# Altium PCB Sinistro_ASP_RevA.PcbDoc (part 1 of 5)
Units mm, origin at the board's own origin, x right, y up, seen from the top; angles counter-clockwise.
Board outline 150 x 110 mm, 8 copper layers (Top Layer (.GTL), MidLayer1 (.G1), +28V and VCC (.GP1), A and D grounds (.GP2), Earth GND (.GP3), +5ANA (.GP4), -5ANA (.GP5), Bottom Layer (.GBL)); 383 components, 275 nets, 1751 pads, 521 vias.
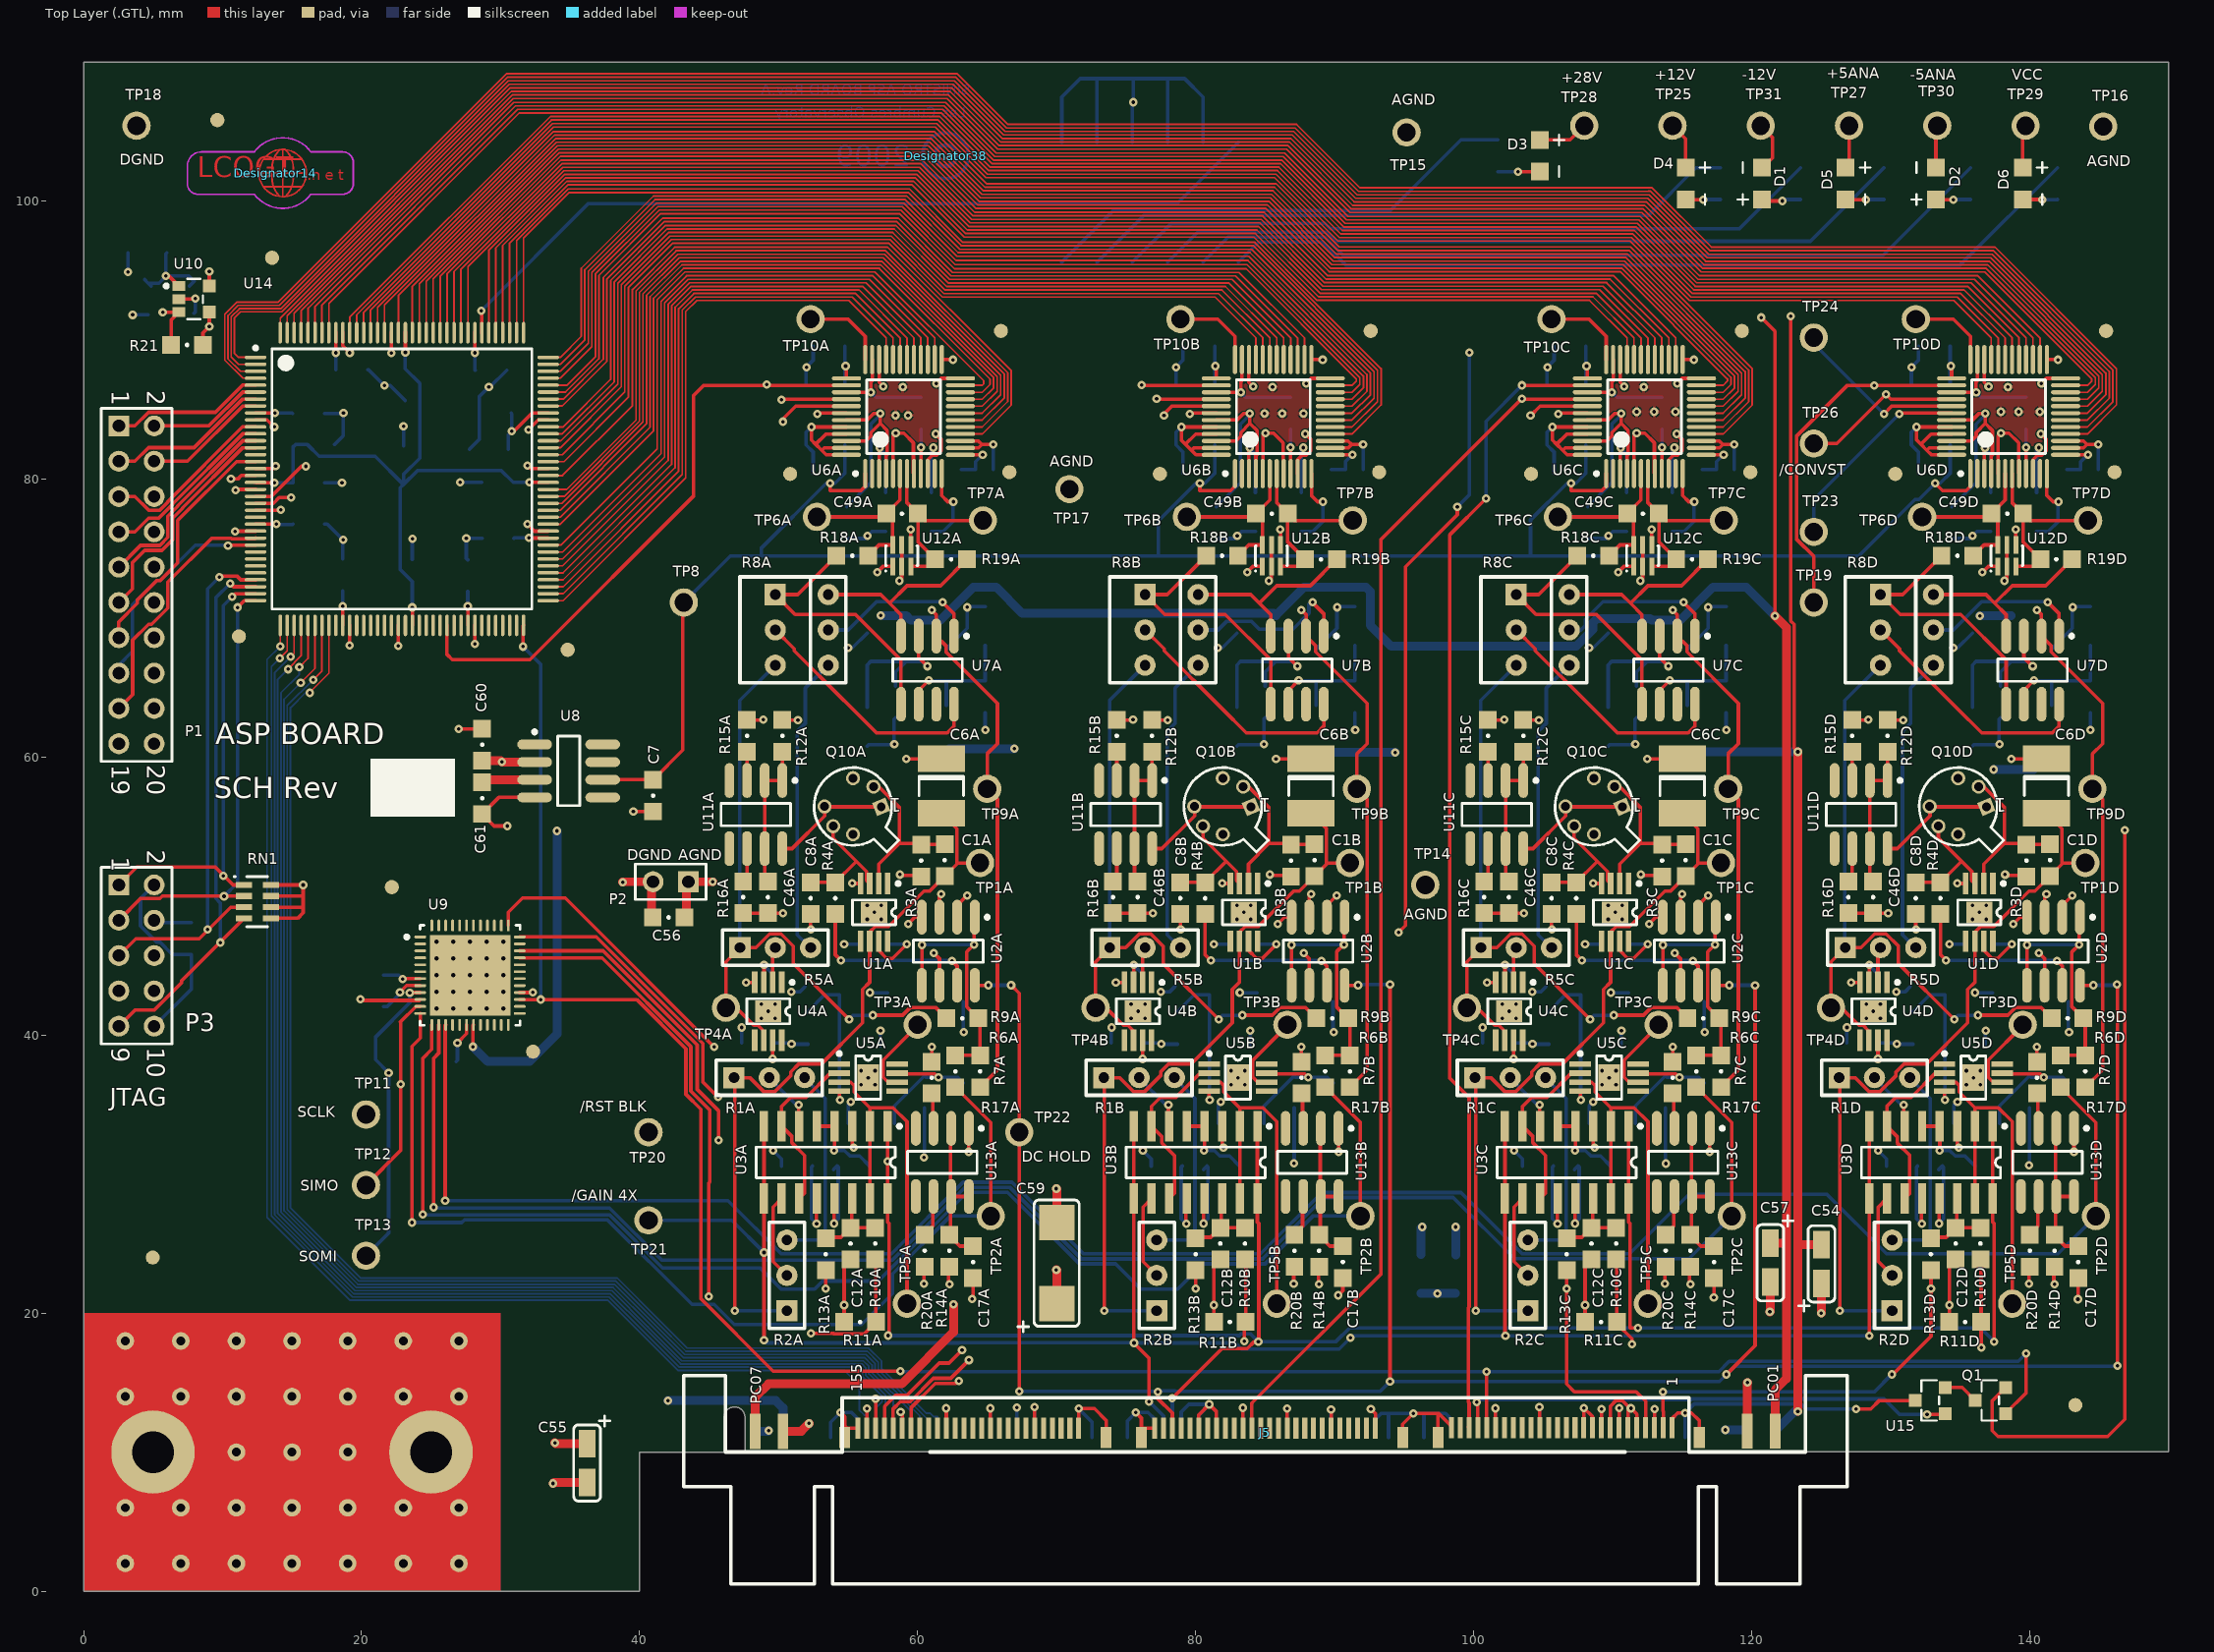
[diagram p0: Top Layer (.GTL) view]
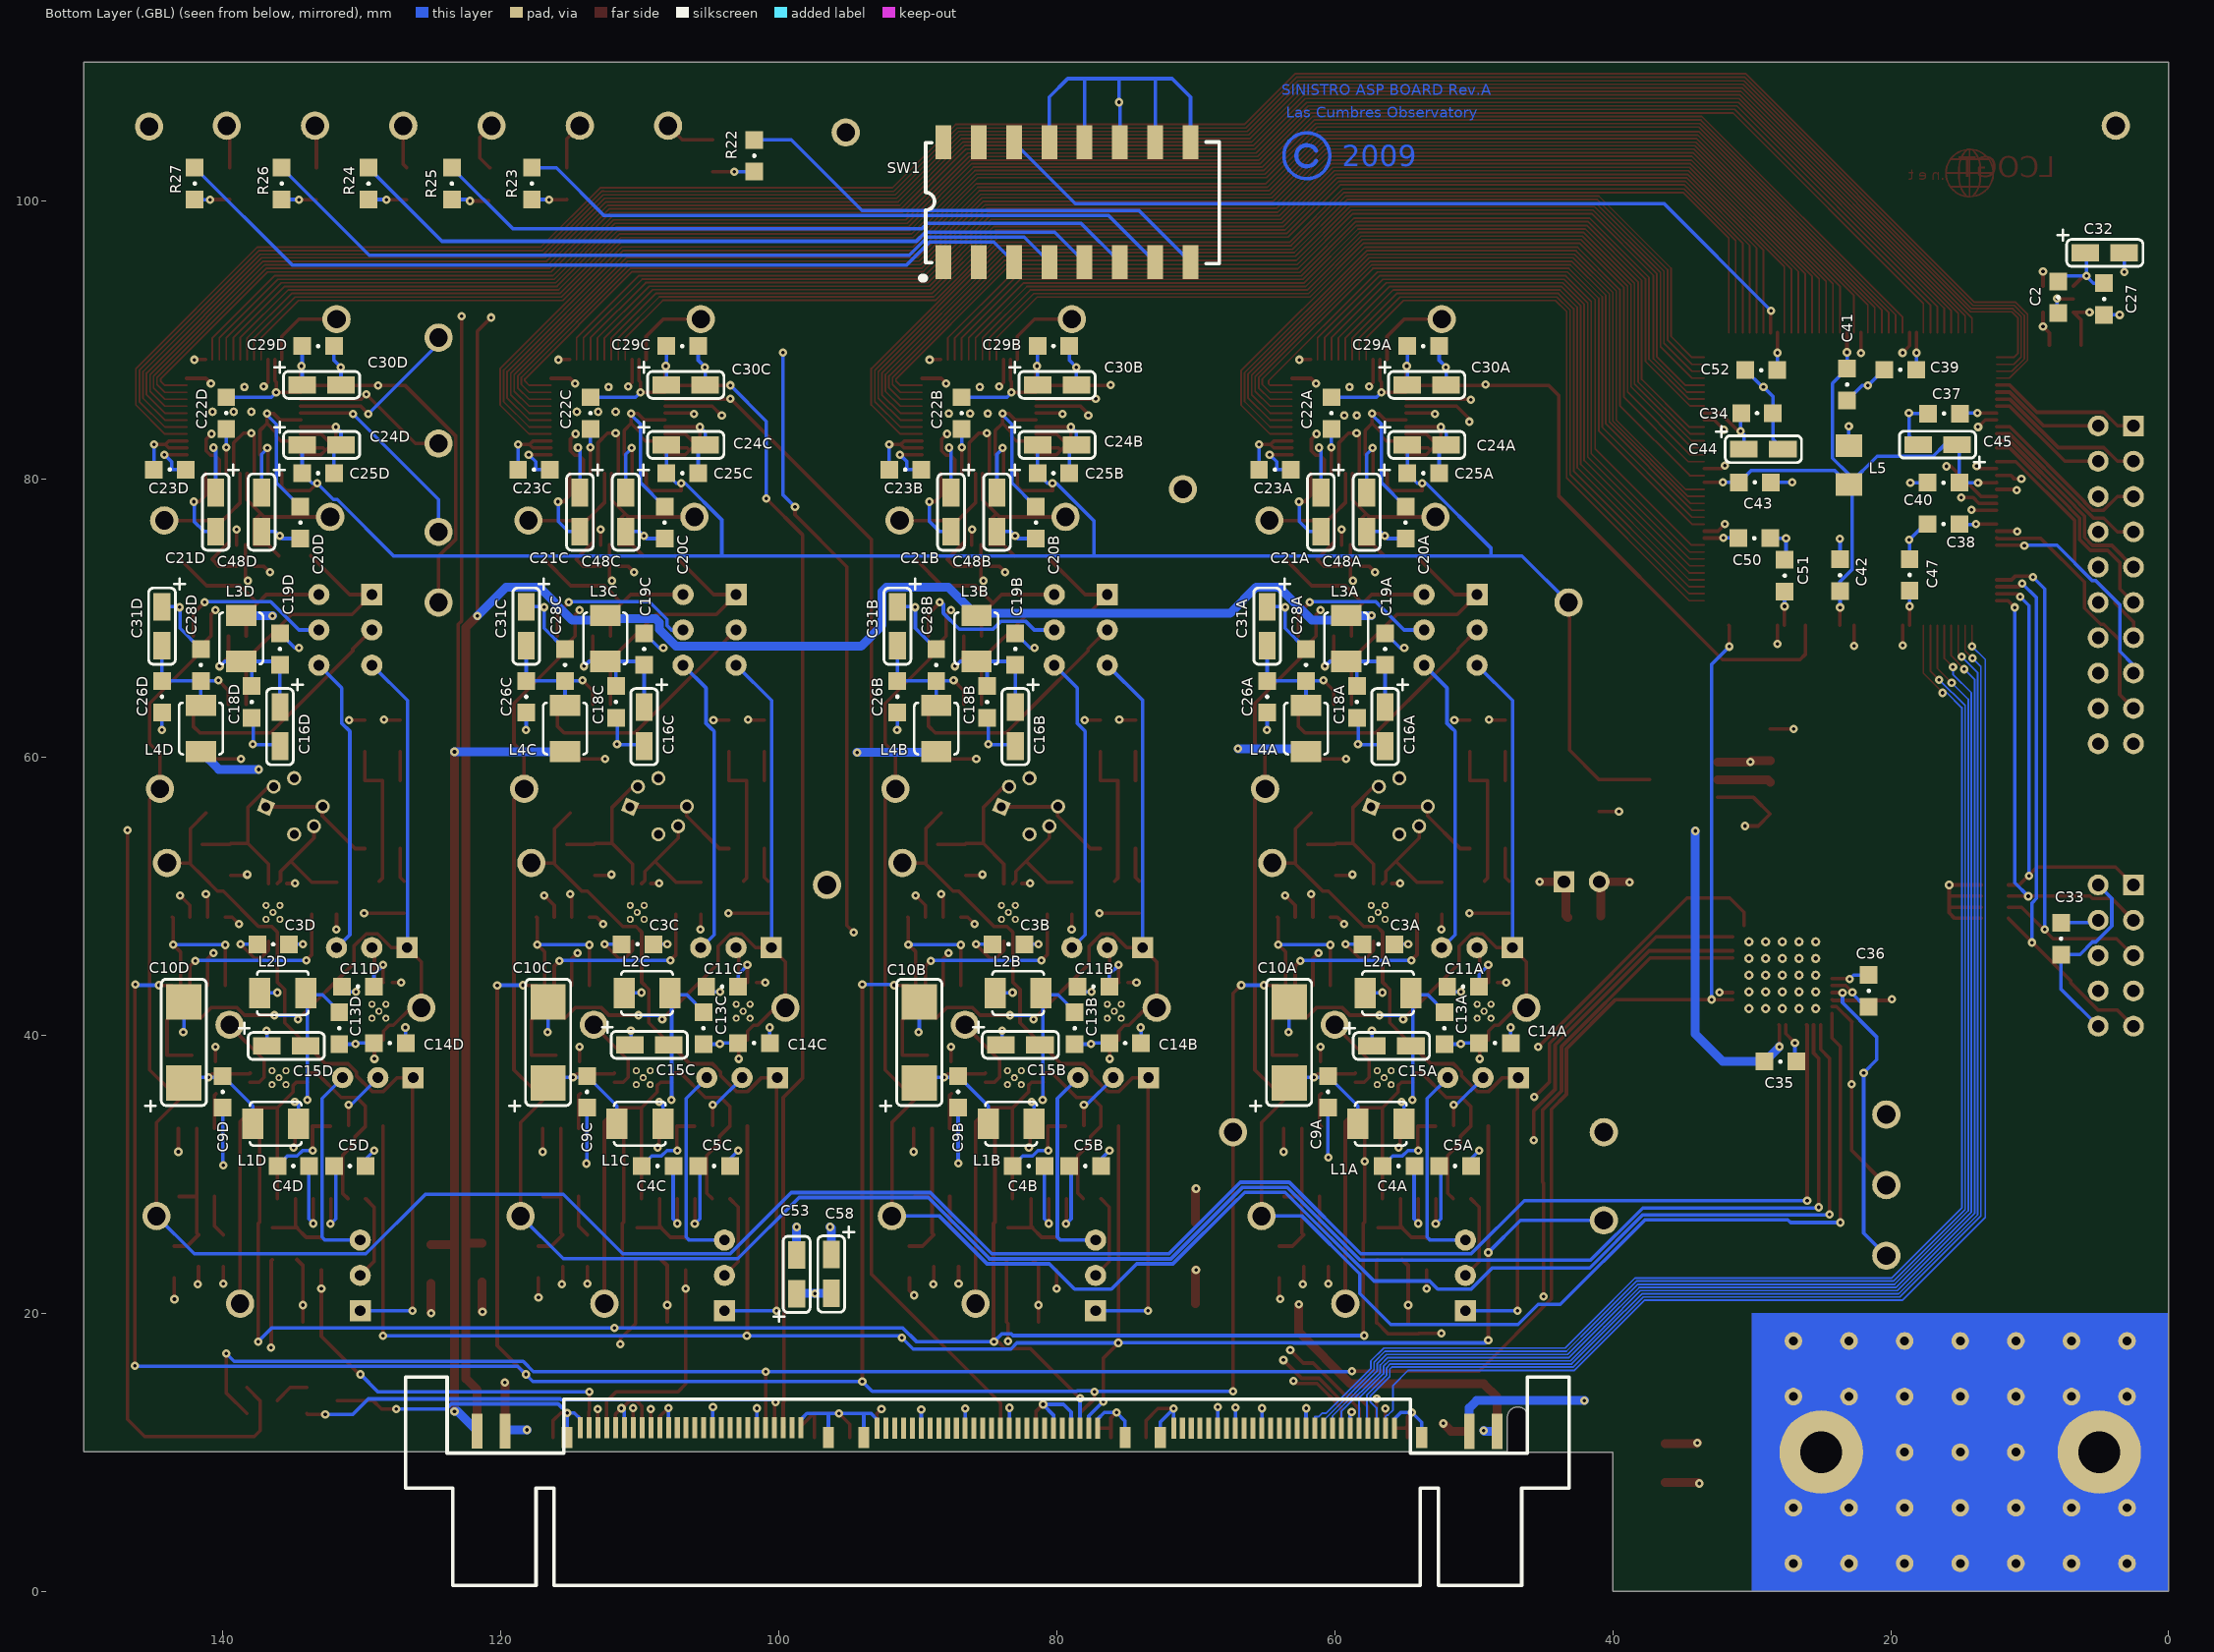
[diagram p1: Bottom Layer (.GBL) view, seen from below]
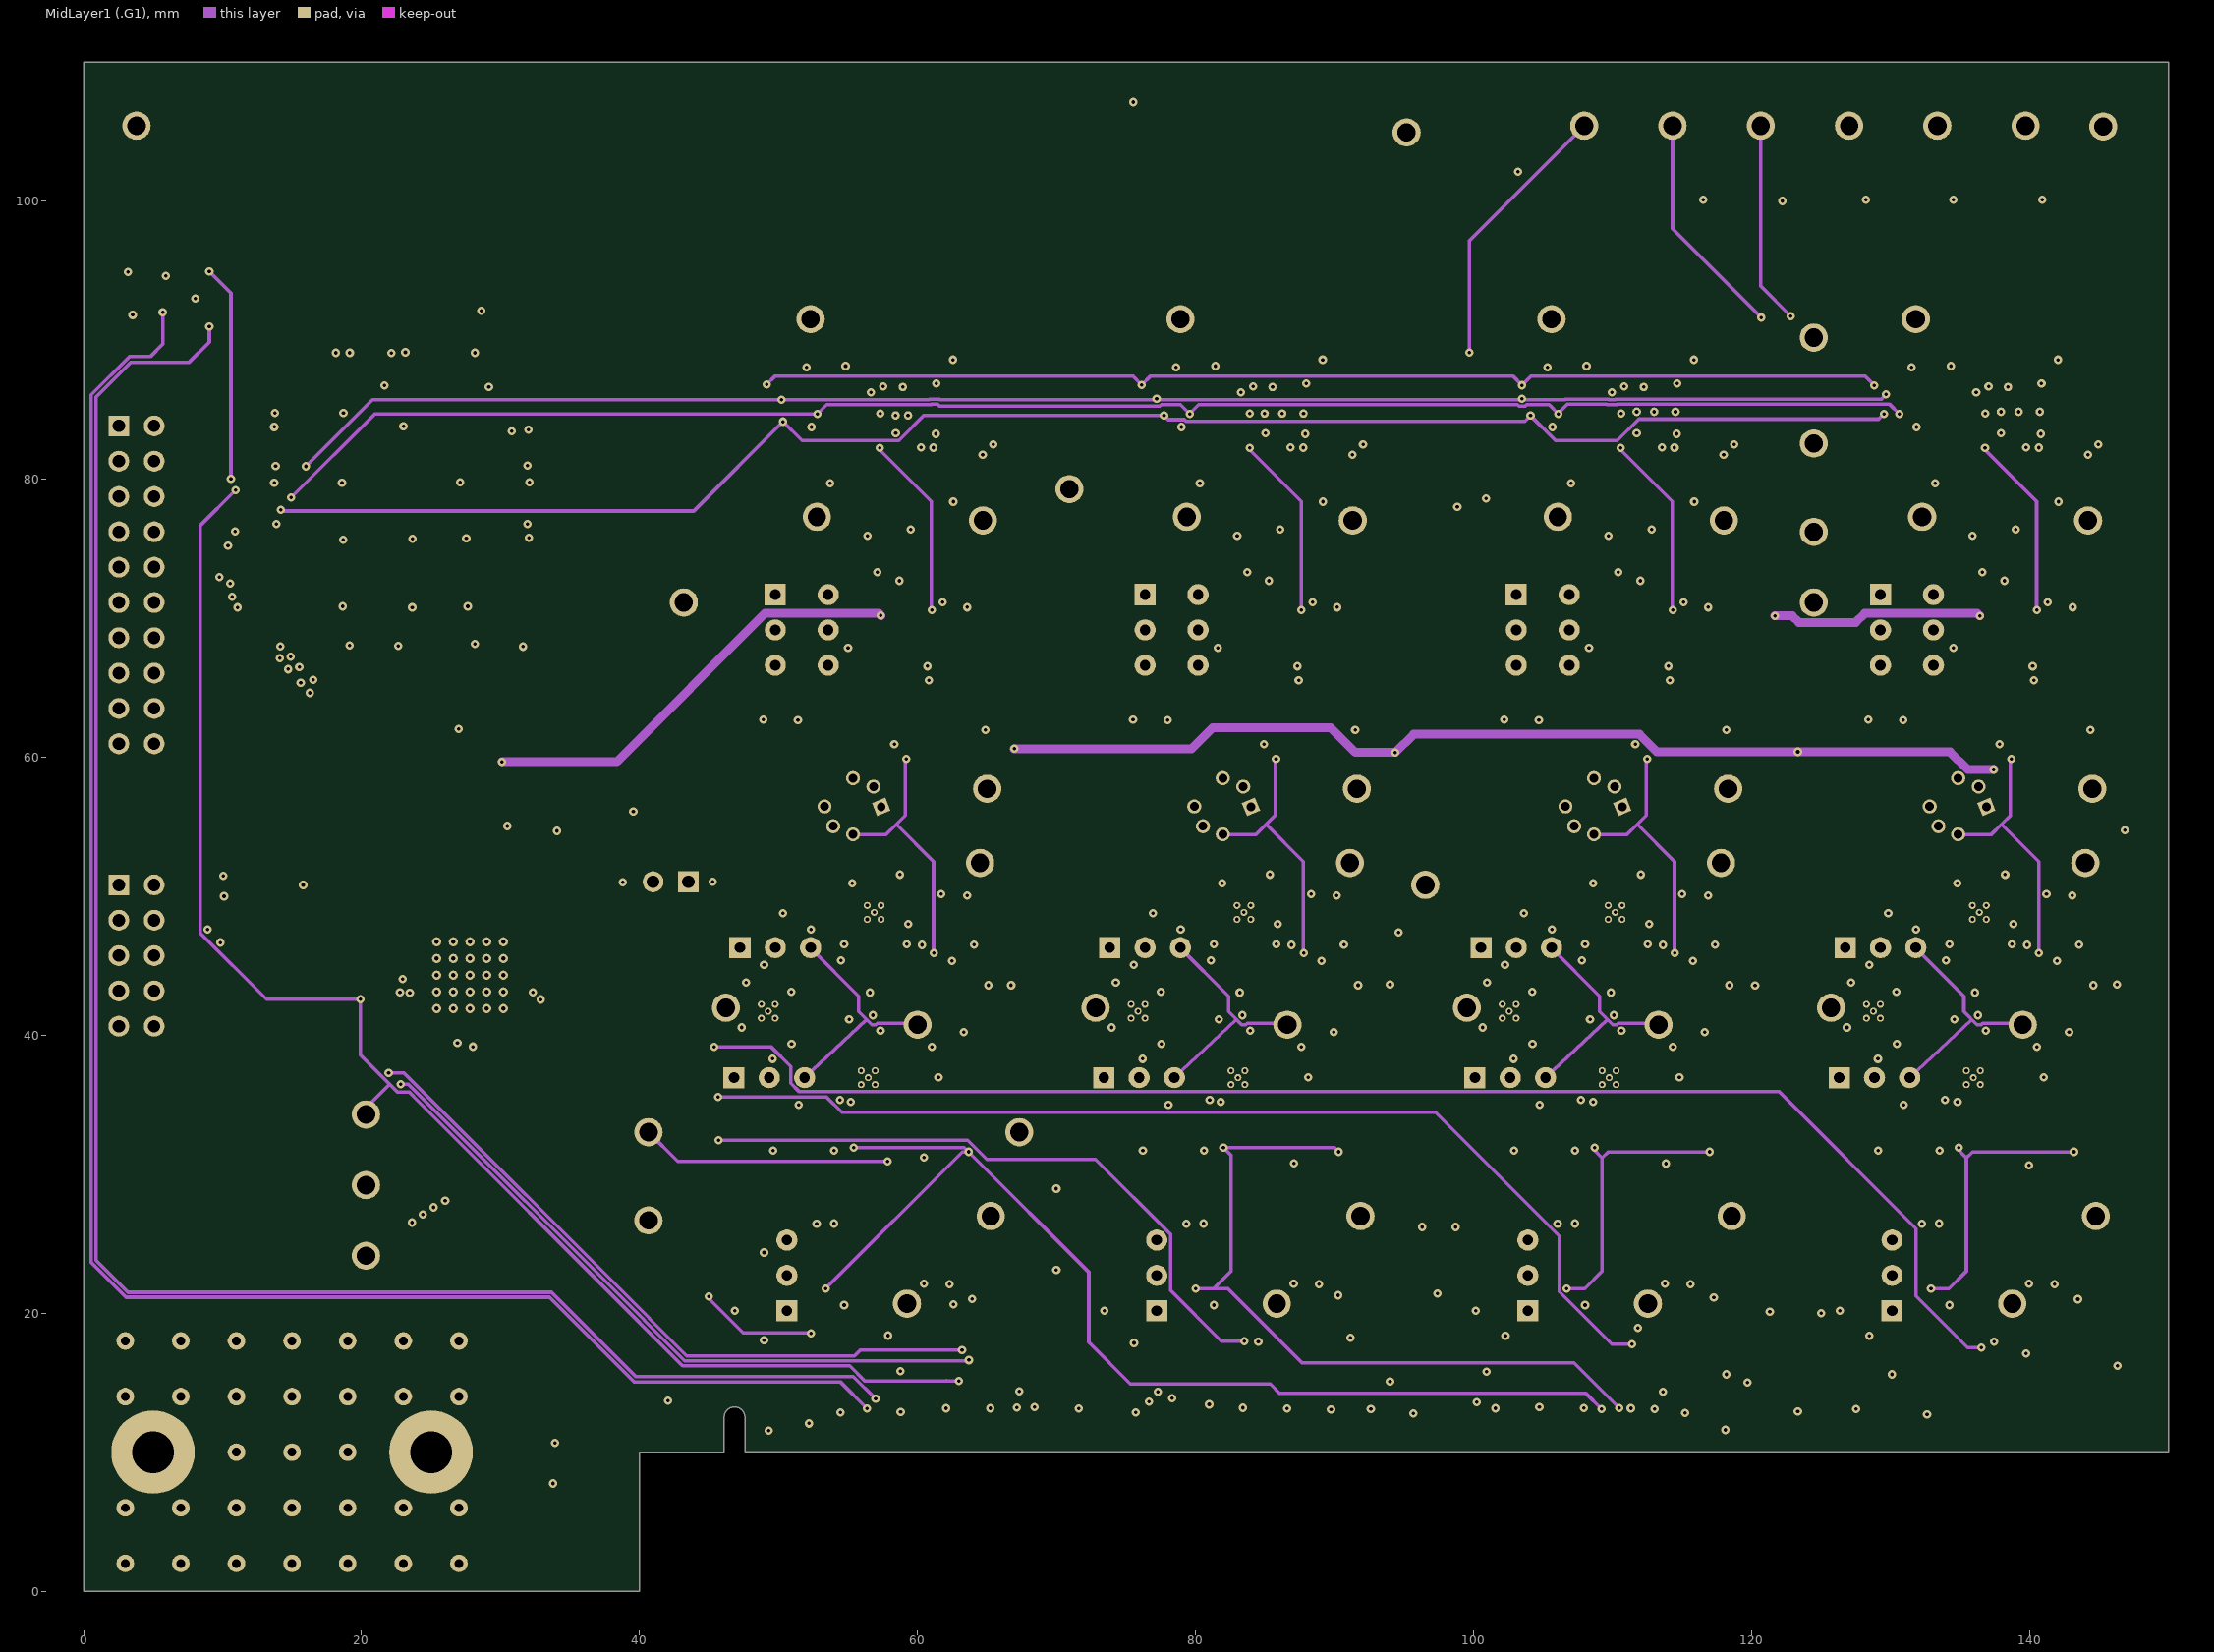
[diagram p2: MidLayer1 (.G1)]
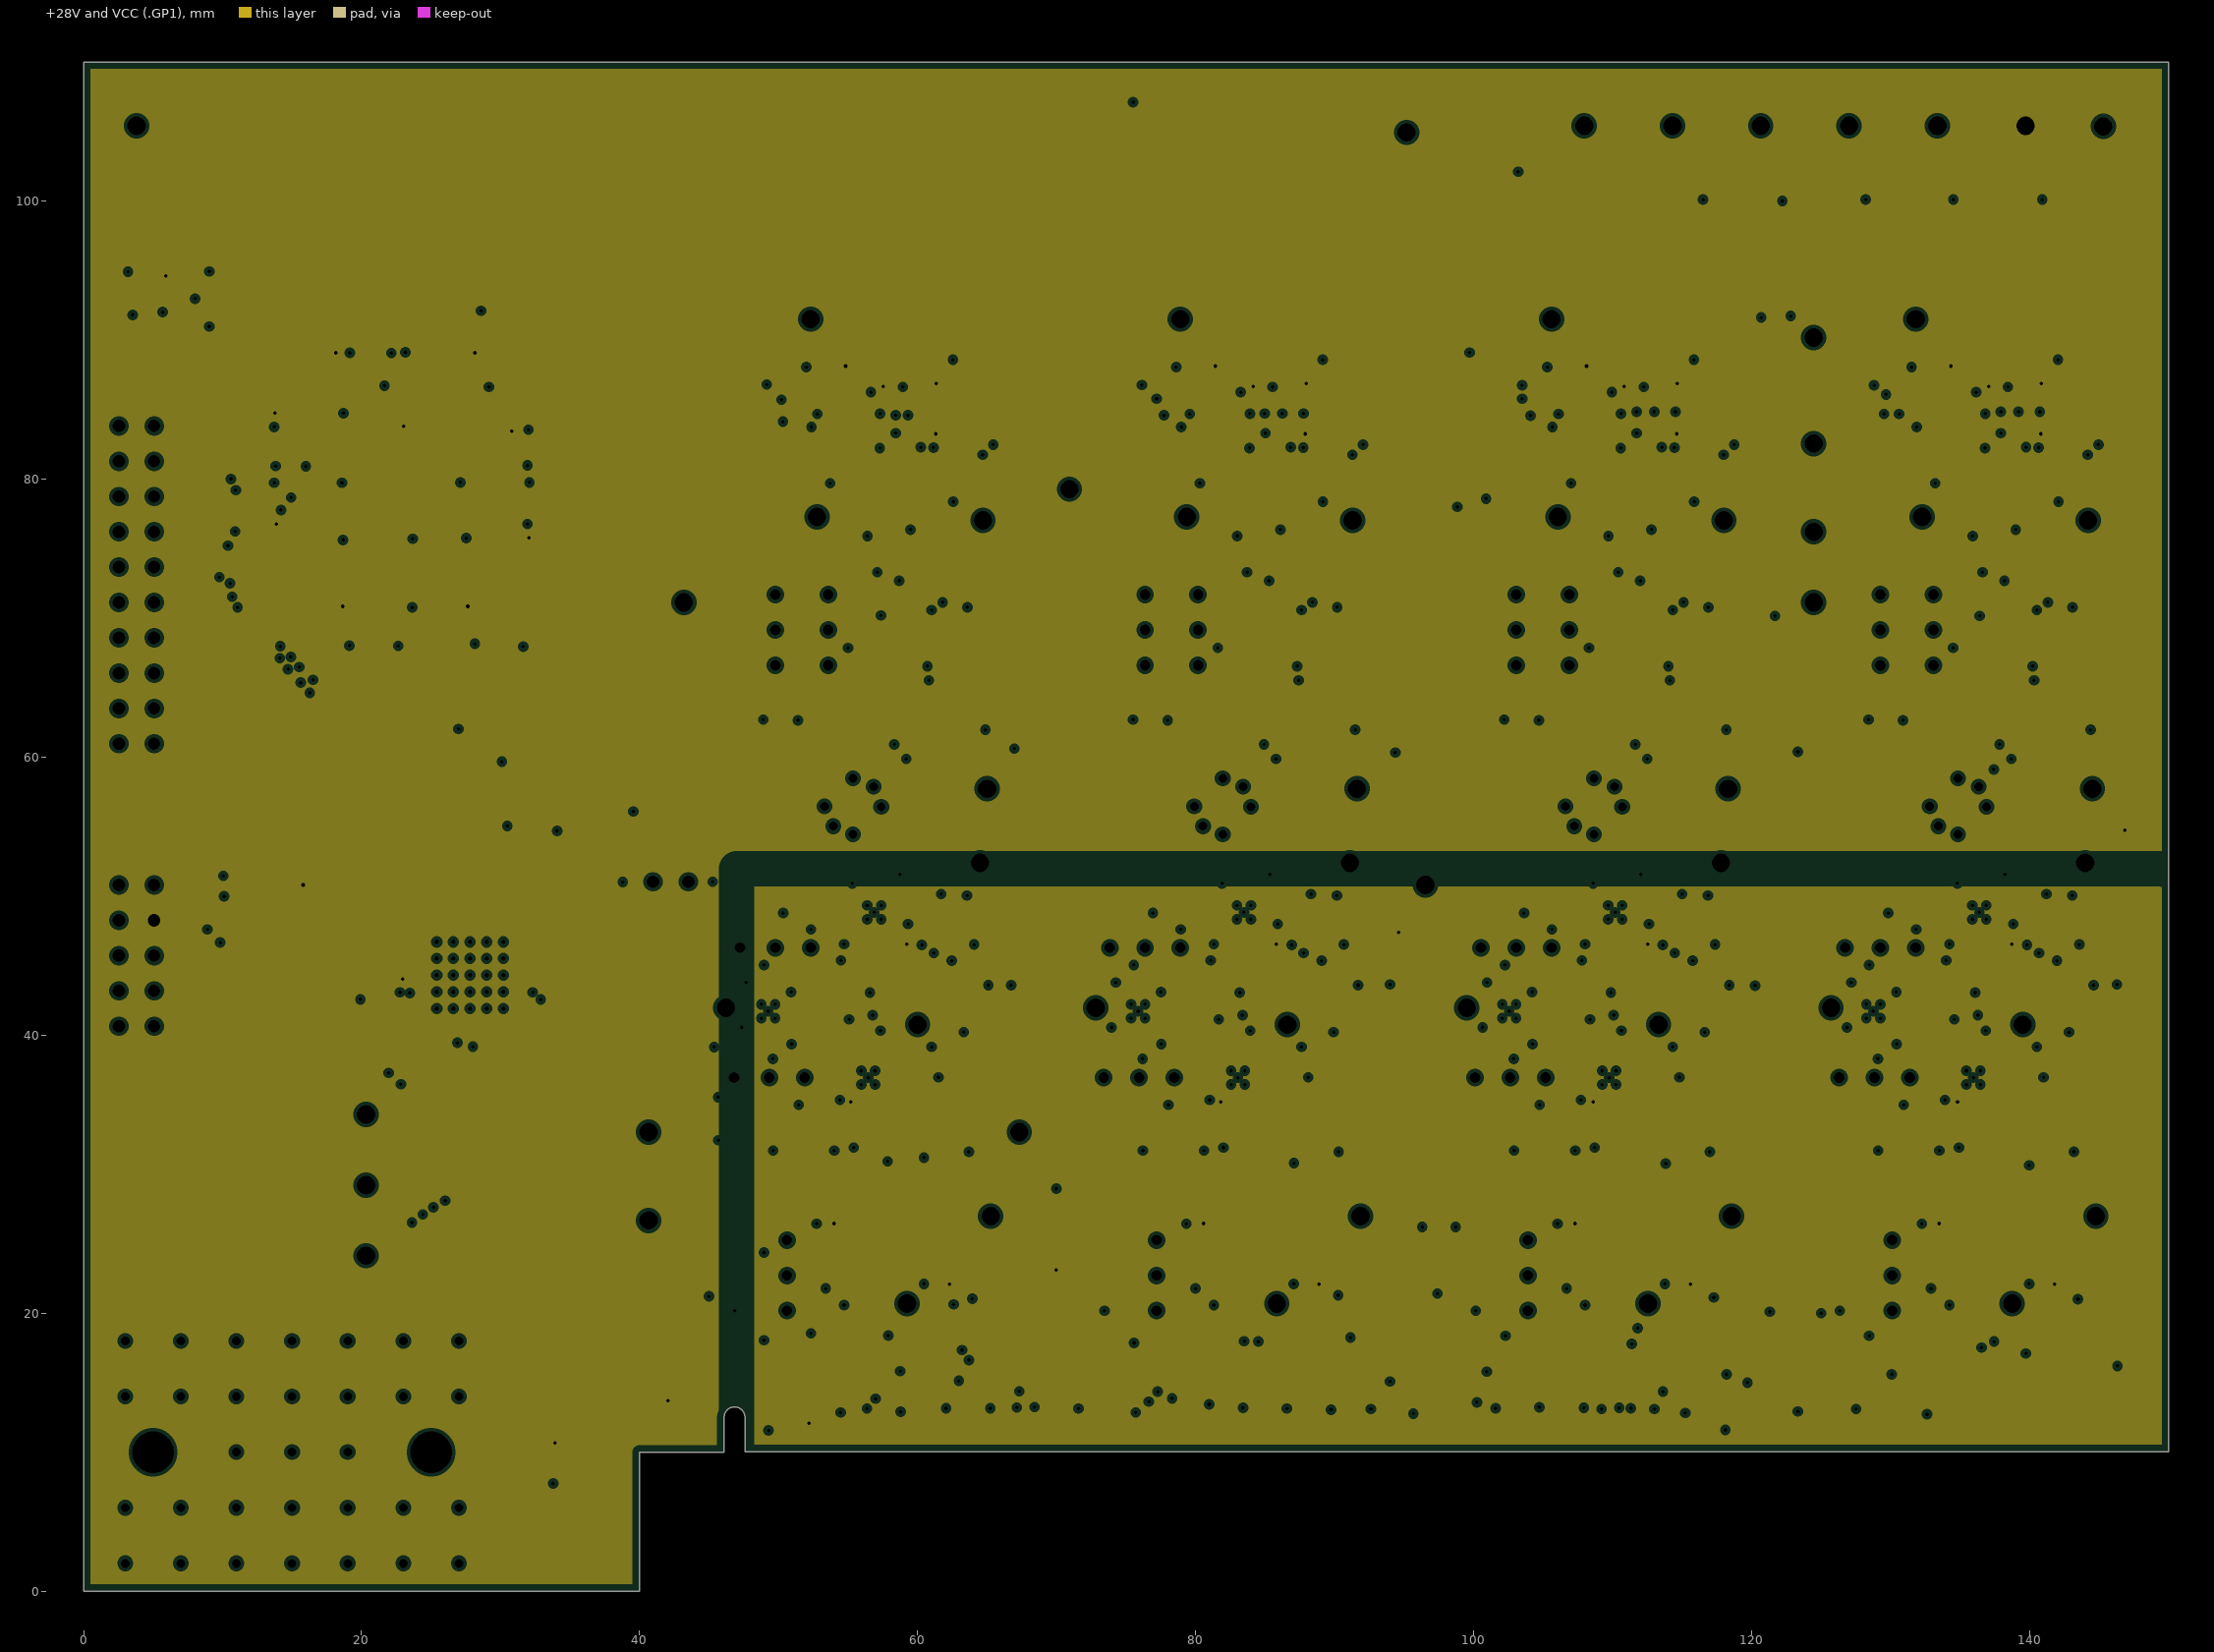
[diagram p3: +28V and VCC (.GP1), clearances drawn from the general rule]
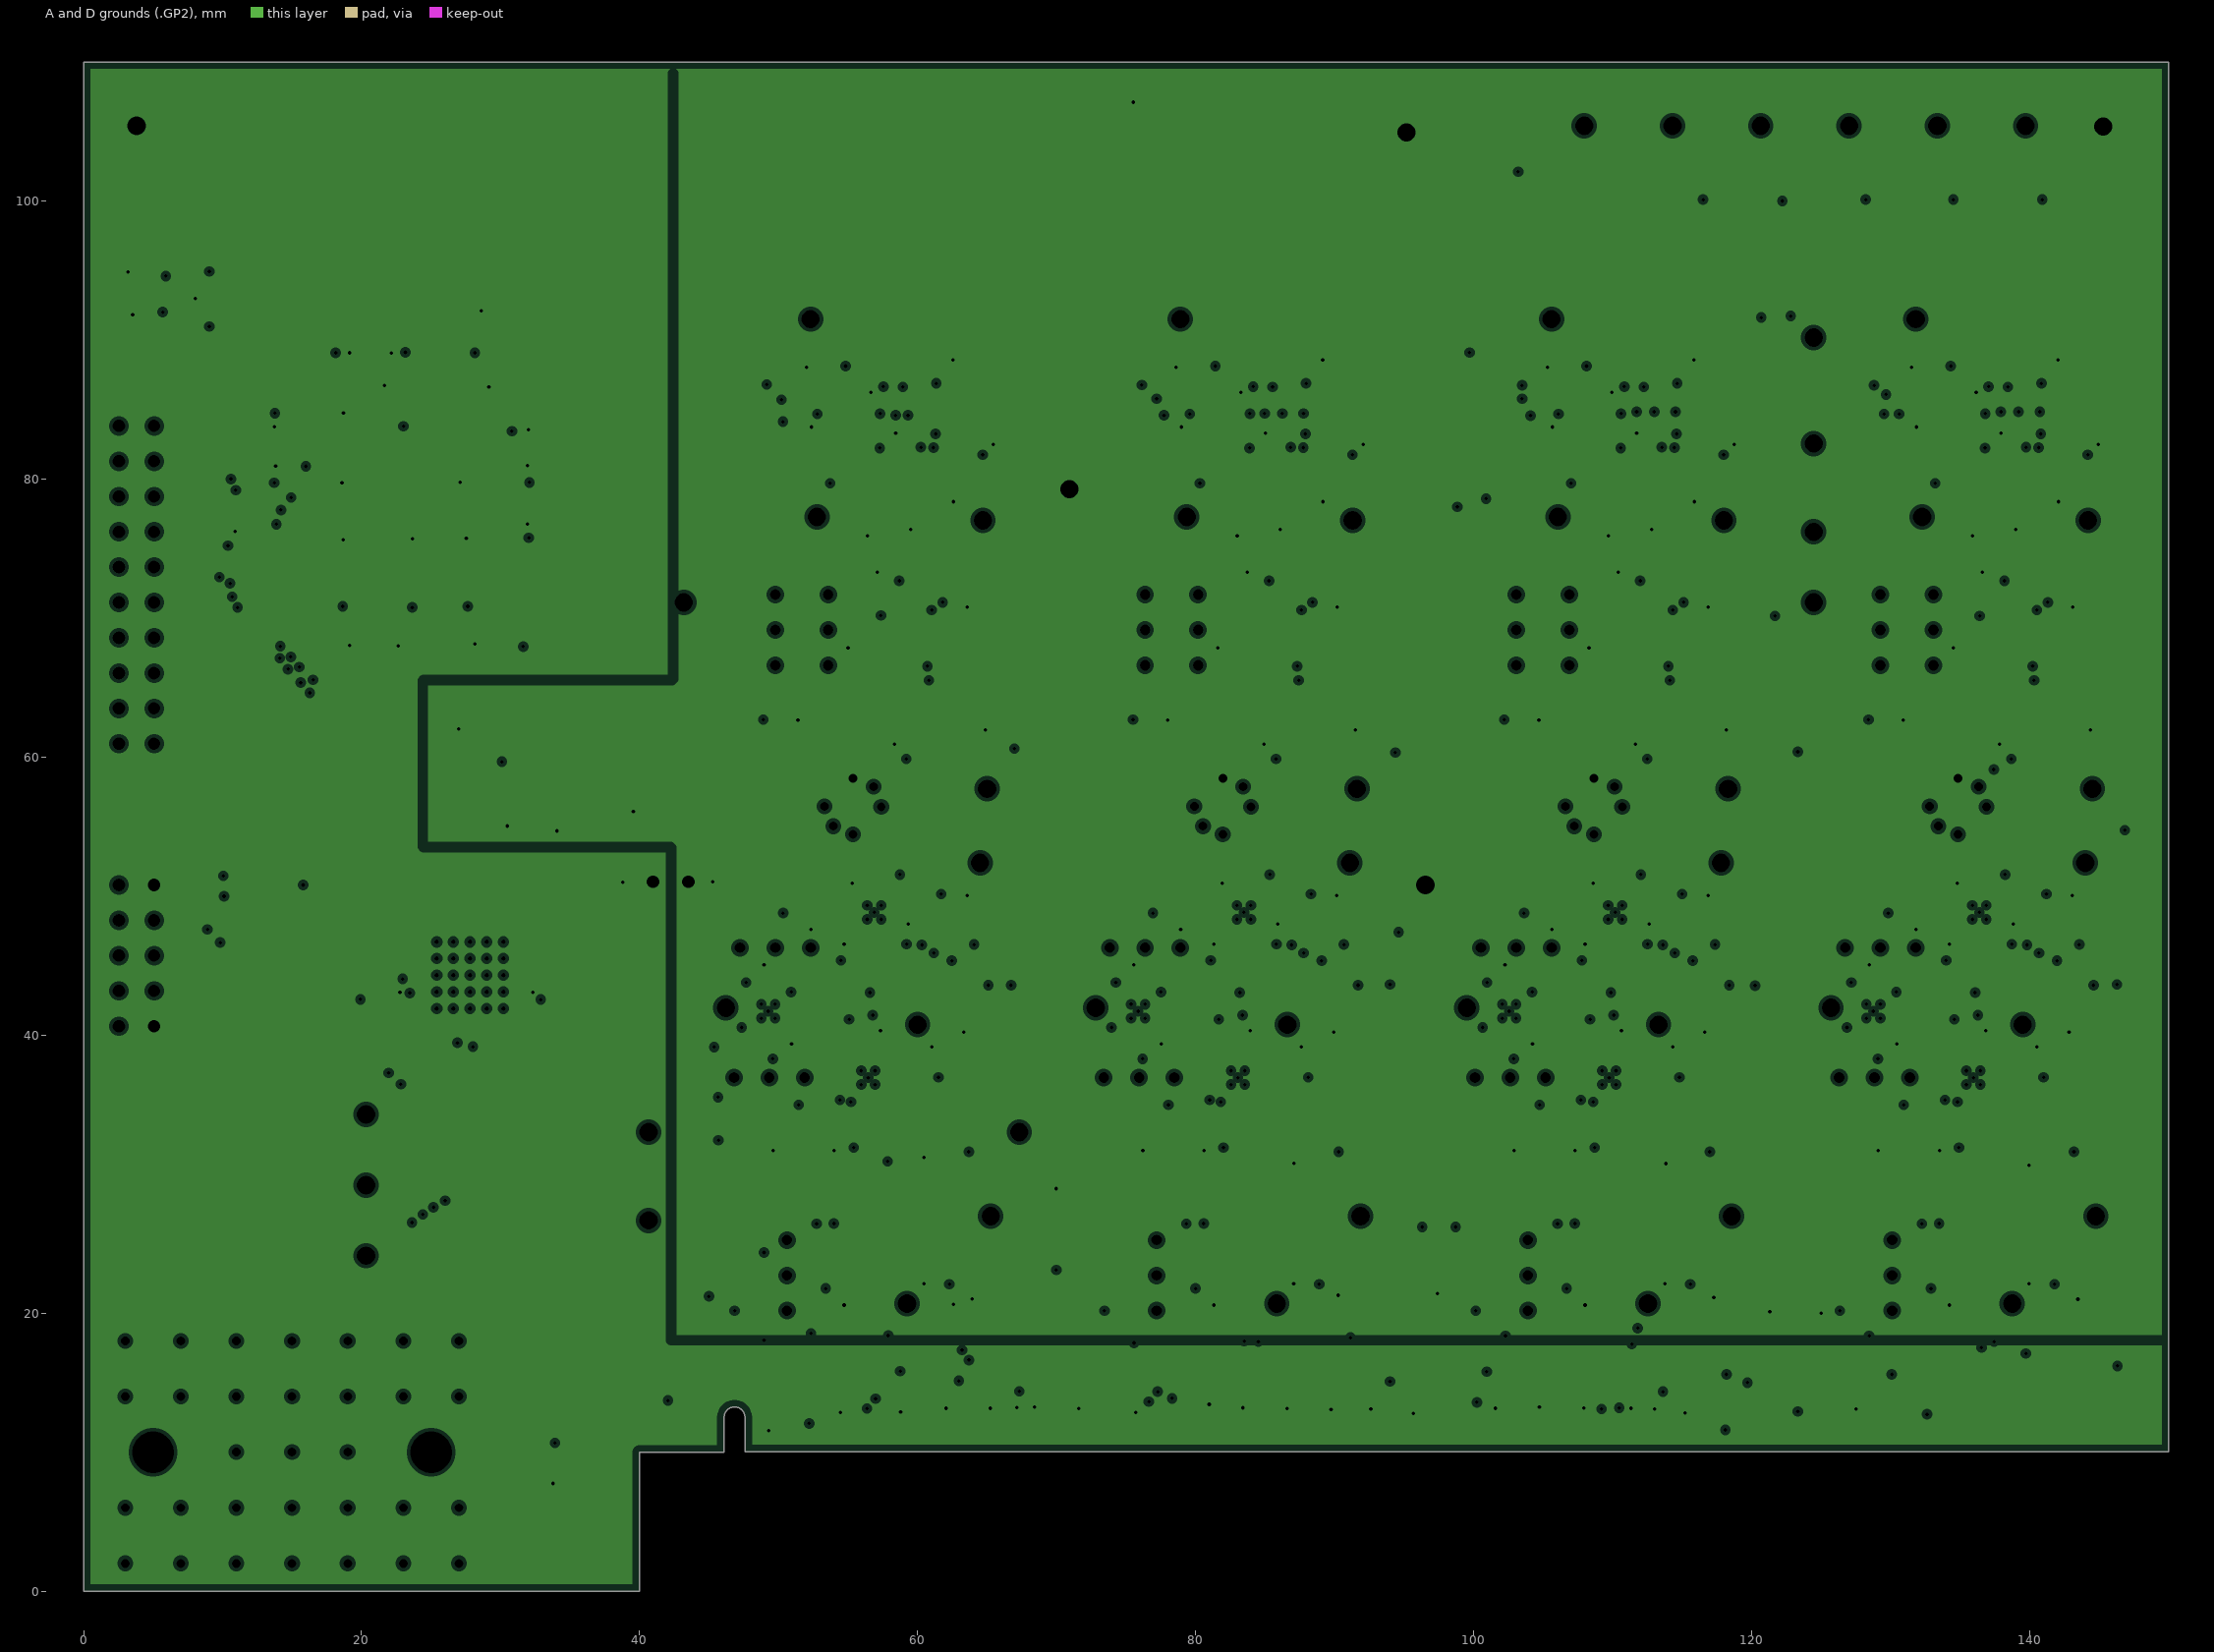
[diagram p4: A and D grounds (.GP2), clearances drawn from the general rule]
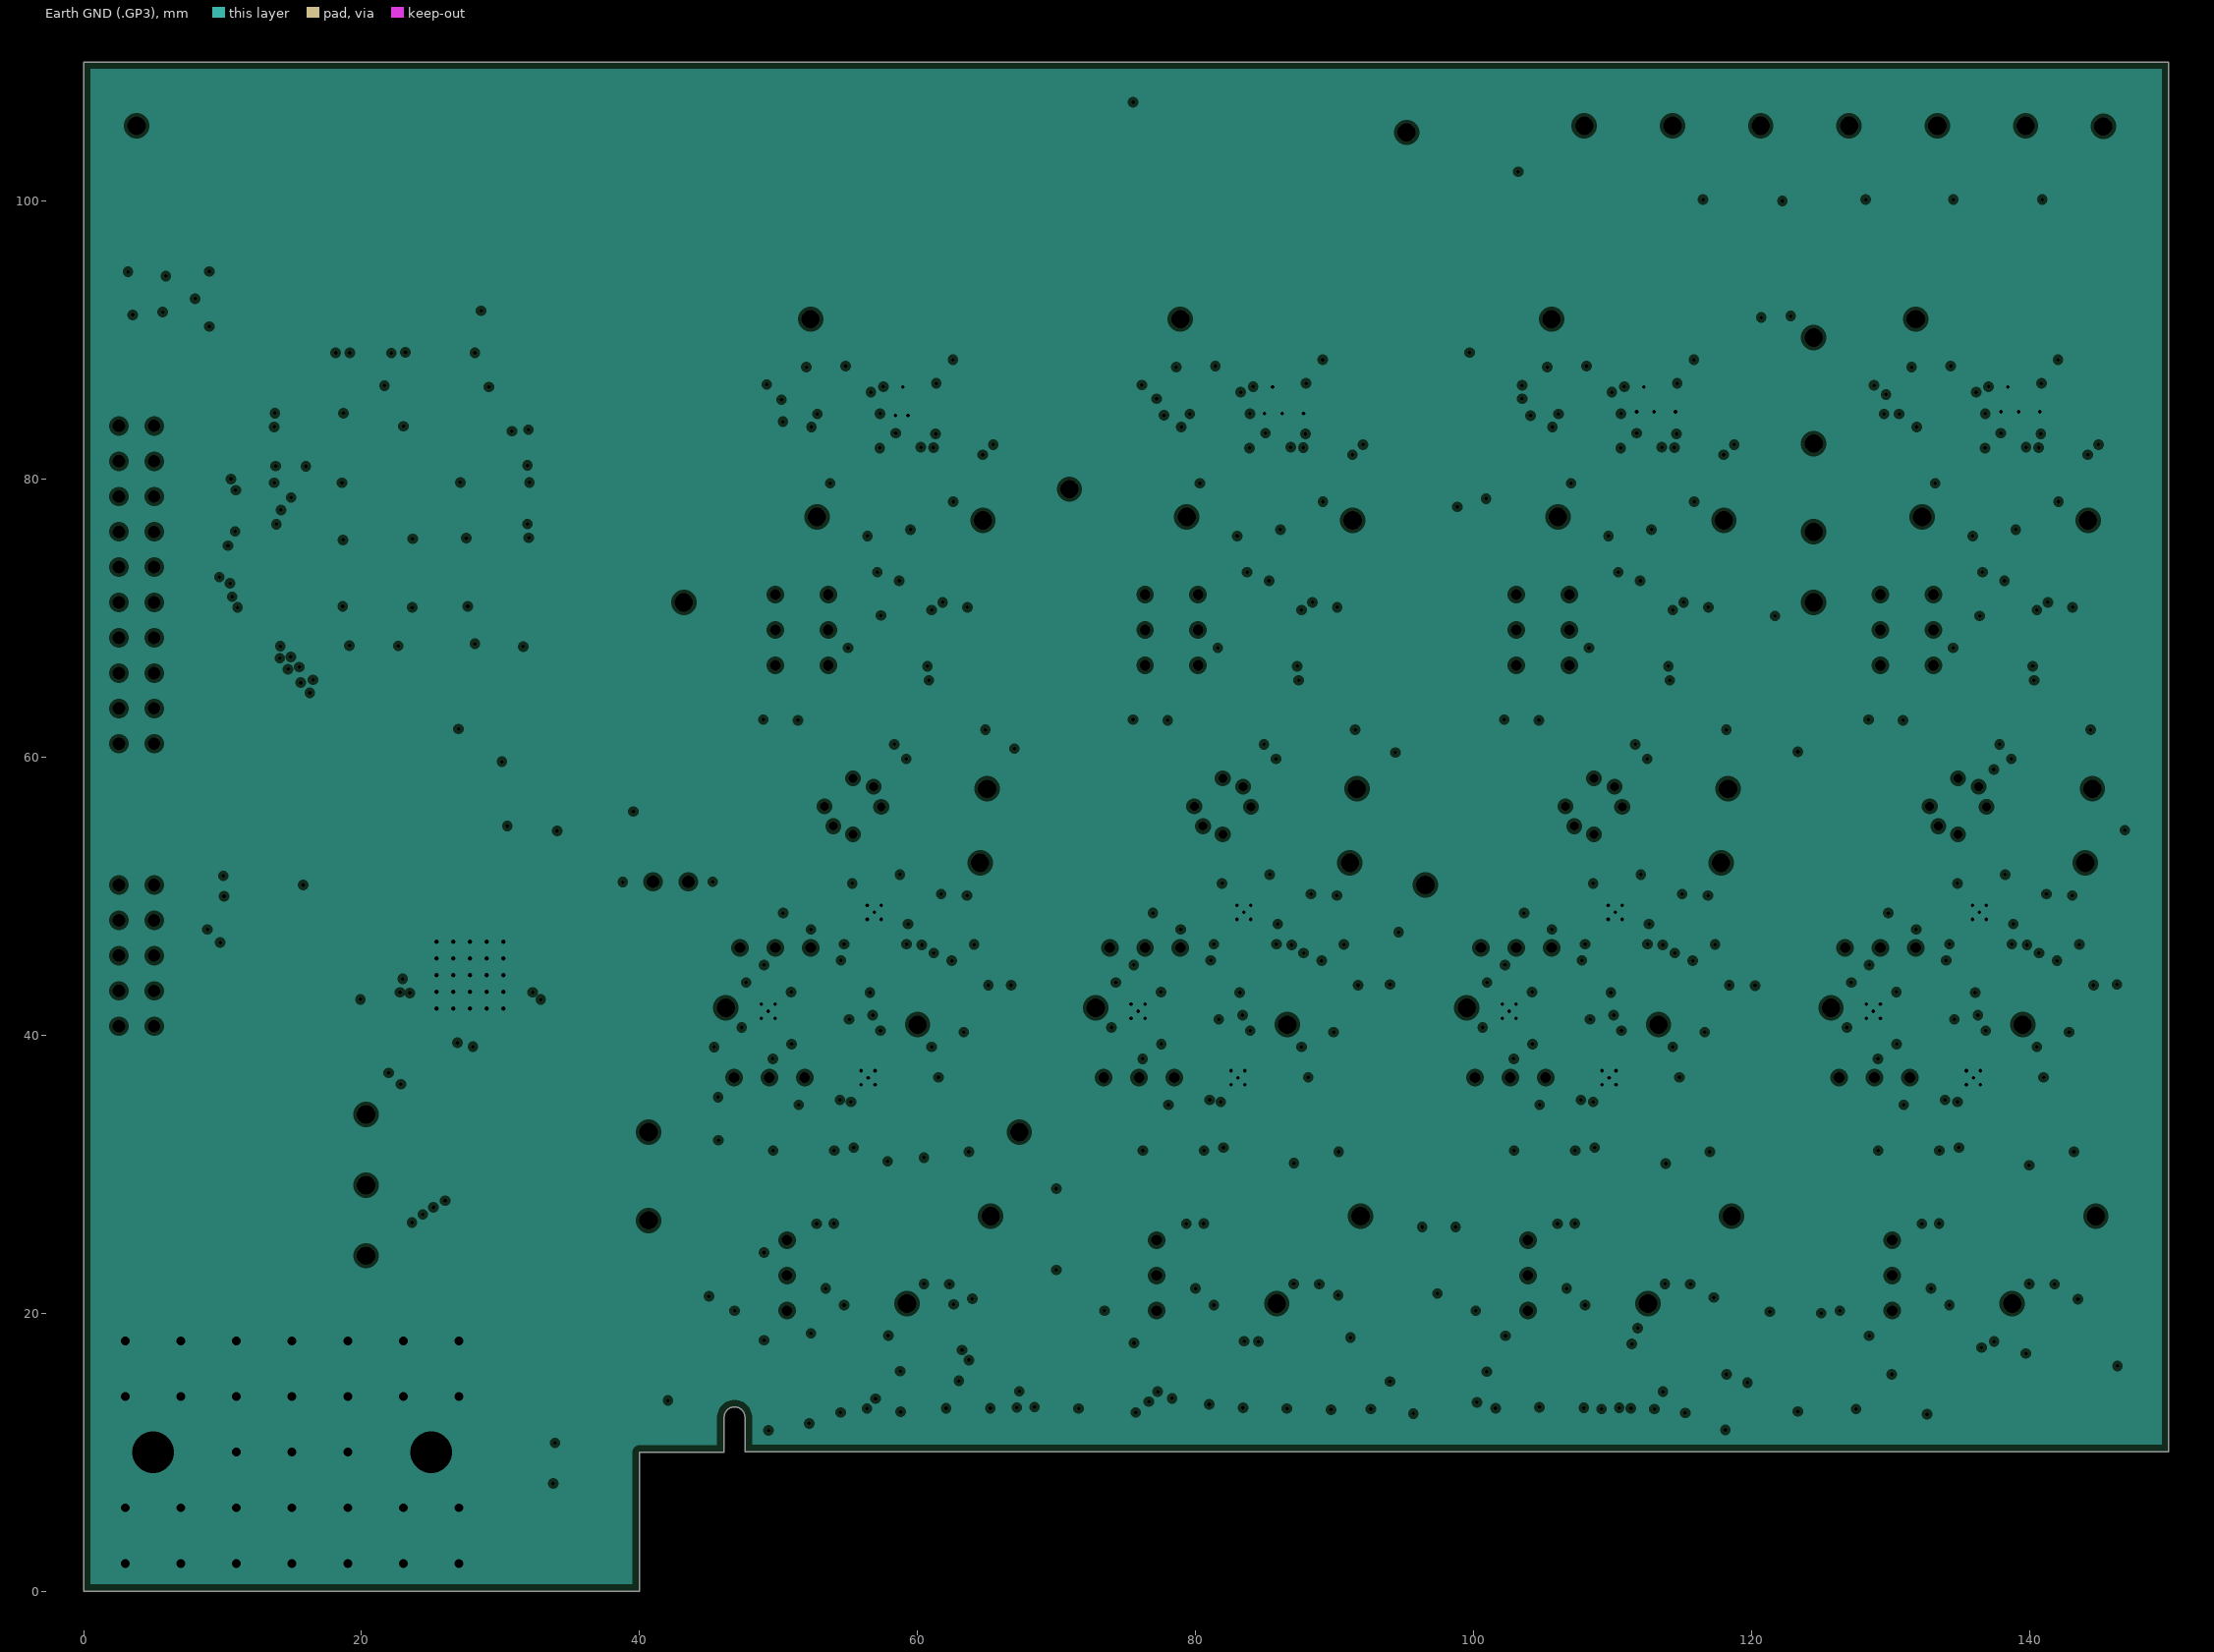
[diagram p5: Earth GND (.GP3), clearances drawn from the general rule]
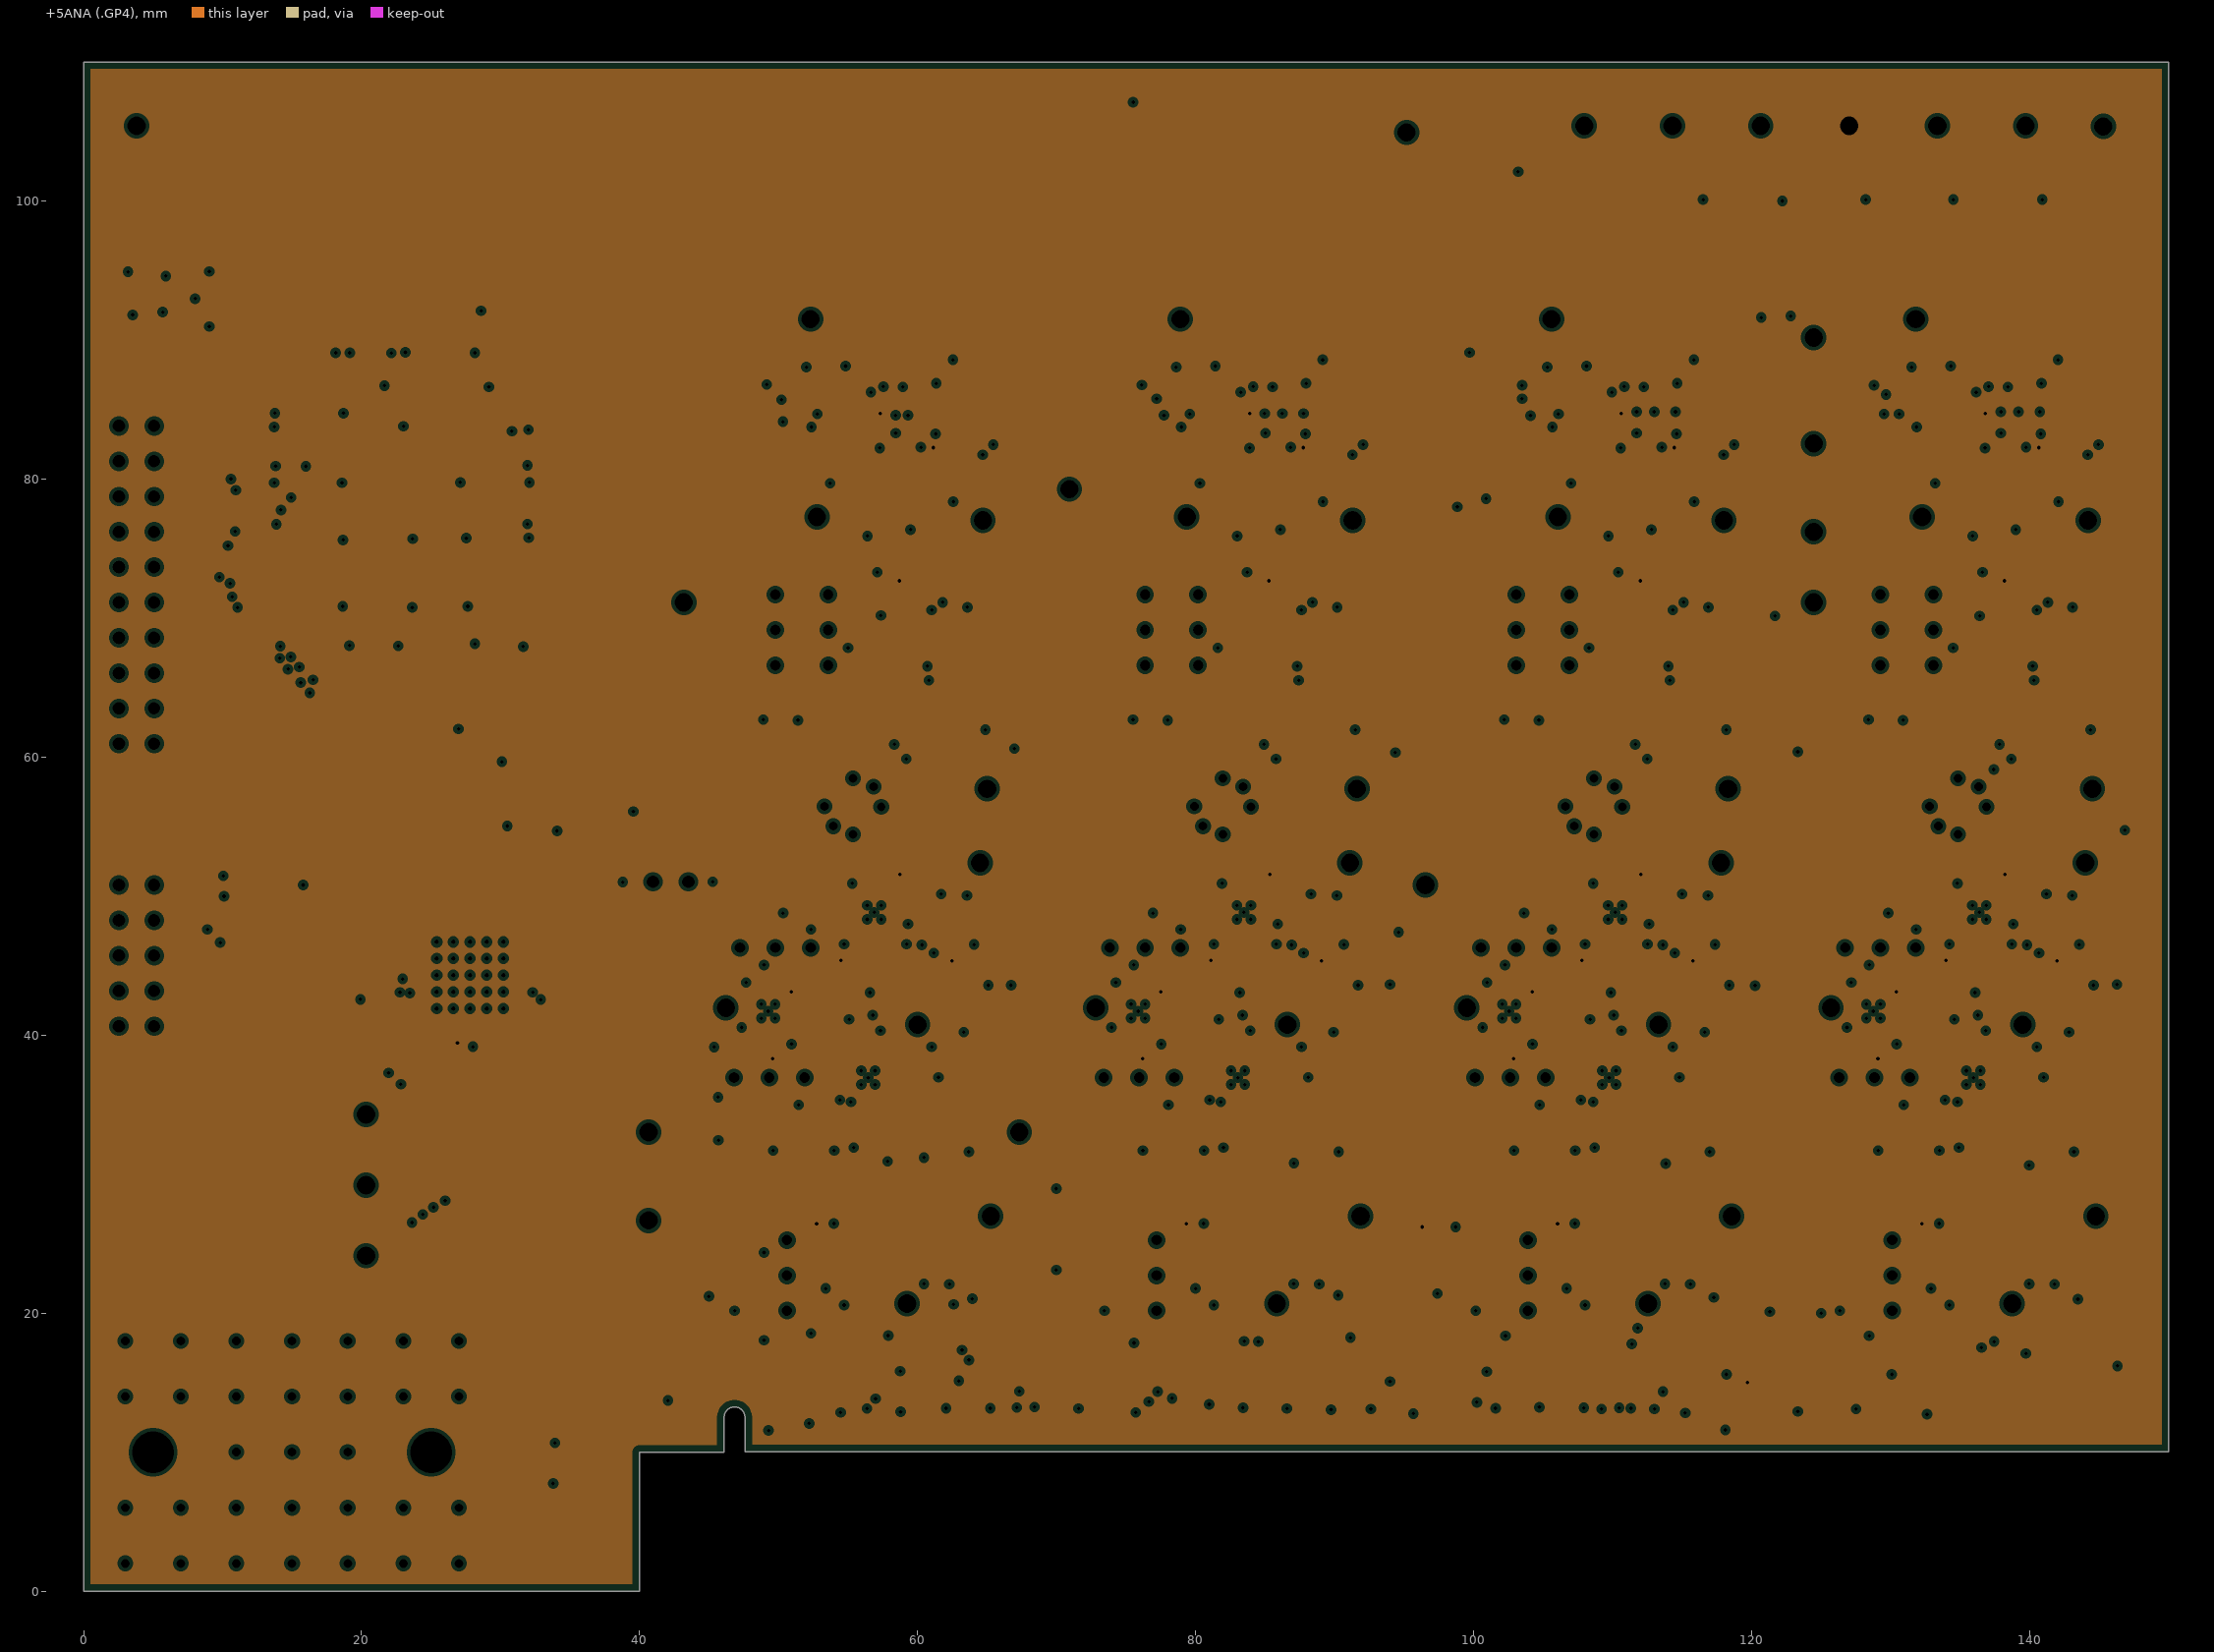
[diagram p6: +5ANA (.GP4), clearances drawn from the general rule]
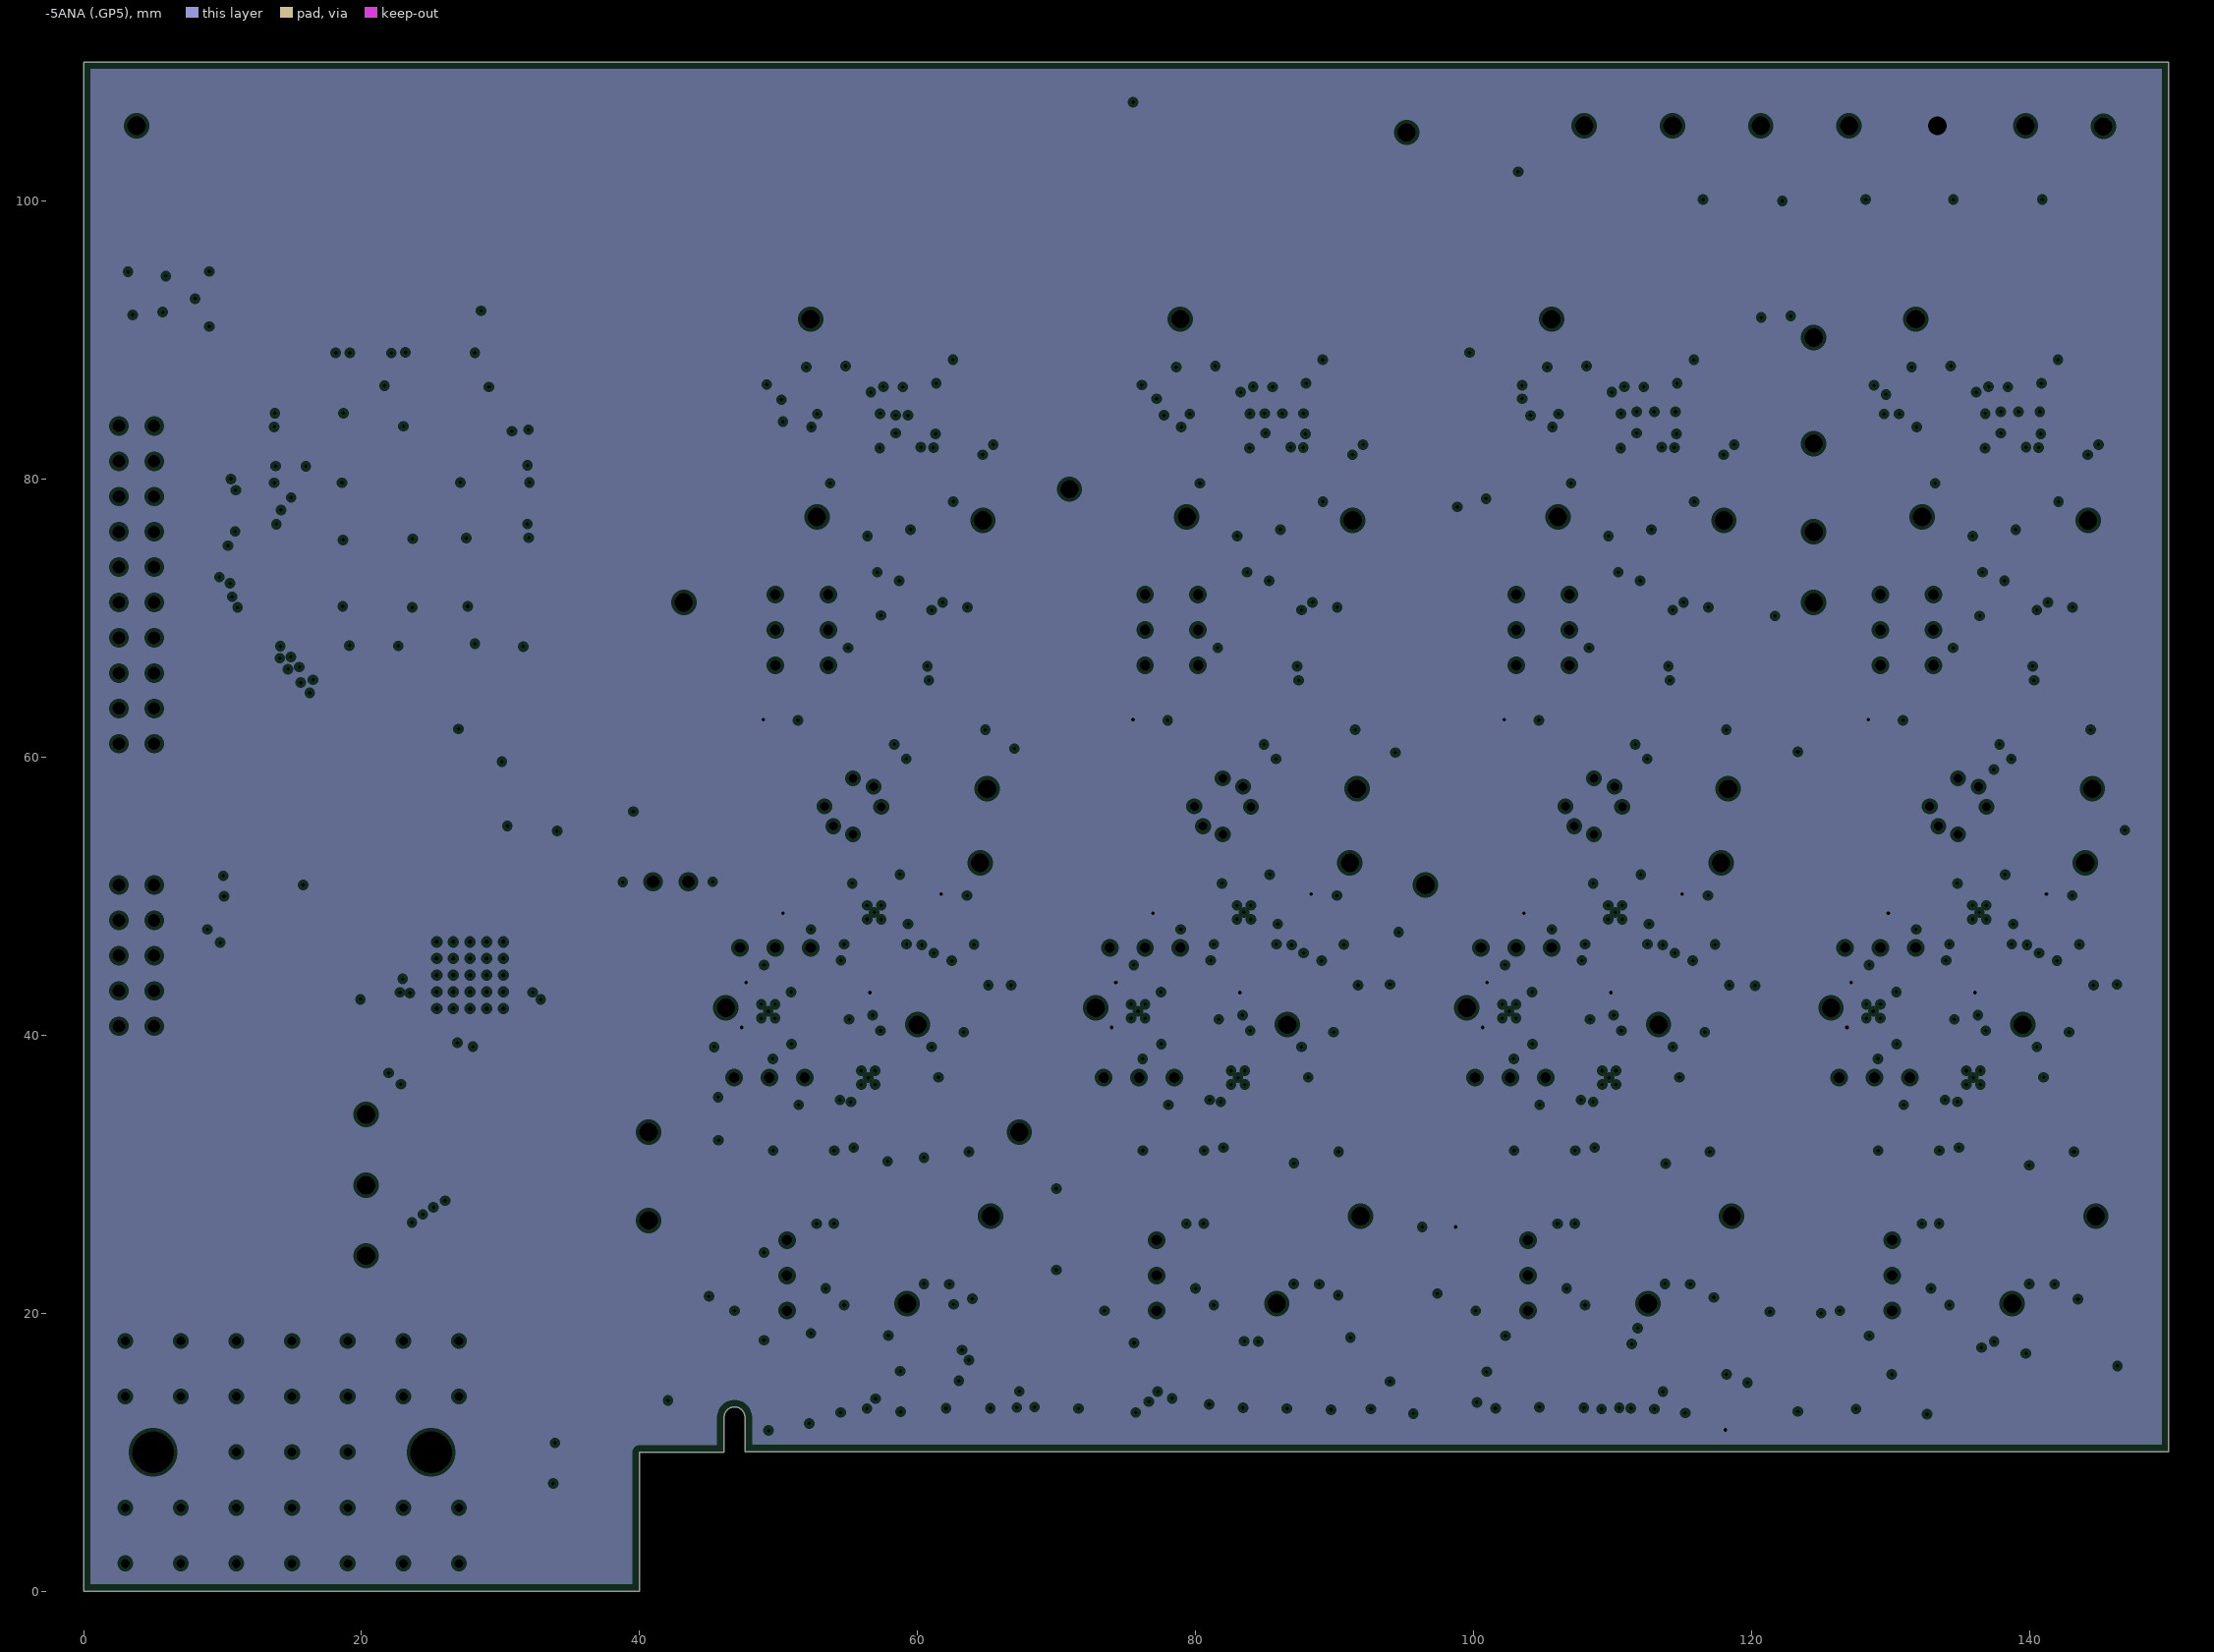
[diagram p7: -5ANA (.GP5), clearances drawn from the general rule]

## Layer stack, top to bottom
Top Layer (.GTL): signal copper 0.0356
Dielectric: prepreg 0.32, FR-4, Dk 4.8
MidLayer1 (.G1): signal copper 0.0356
Dielectric: core 0.32, FR-4, Dk 4.8
+28V and VCC (.GP1): plane copper 0.0356, net (Multiple Nets)
Dielectric: prepreg 0.32, FR-4, Dk 4.8
A and D grounds (.GP2): plane copper 0.0711, net (Multiple Nets)
Dielectric: core 0.32, FR-4, Dk 4.8
Earth GND (.GP3): plane copper 0.0711, net E
Dielectric: prepreg 0.32, FR-4, Dk 4.8
+5ANA (.GP4): plane copper 0.0356, net +5ANA
Dielectric: core 0.32, FR-4, Dk 4.8
-5ANA (.GP5): plane copper 0.0356, net -5ANA
Dielectric: prepreg 0.32, FR-4, Dk 4.8
Bottom Layer (.GBL): signal copper 0.0356

## Board outline
0,0 0,110 150,110 150,10.021 47.579,10.021 47.579,12.5 ccw(c46.829,12.5) 46.079,12.5 46.079,10 40,10 40,0

## Design rules (kind name [scope] priority, off if disabled: settings)
Clearance "MSOP pad spacing" [(HasFootprint('TQFP48_m') or HasFootprint('RM-8'))] p1: gap=0.152
Clearance [All] p2: gap=0.102
ComponentClearance "P1/P2 clearance" [(InComponent('P1')) vs (InComponent('P2'))] p1: gap=-1 collisioncheckmode=3 verticalgap=0.254 showdistances=FALSE
ComponentClearance [All] p2: gap=0.127 collisioncheckmode=3 verticalgap=0.254 showdistances=TRUE
FabricationTestPointUsage TestPointUsage [All] p1: valid=0 allowmultiple=FALSE
FabricationTestpoint Testpoint [All] p1: side=3 testpointundercomponent=TRUE minsize=1.016 maxsize=2.54 preferedsize=1.524 minholesize=0.508 maxholesize=1.016 preferedholesize=0.813 testpointgrid=0.025 allowsidetop=TRUE allowsidebottom=TRUE usegrid=TRUE gridtolerance=0
HoleSize [All] p1: absolutevalues=TRUE maxlimit=7.62 minlimit=0.025 maxpercent=80.000 minpercent=20.000
PlaneClearance [All] p1: clearance=0.254
PlaneConnect PlaneConnect_1 [(InNet('E'))] p1: planeconnectstyle=Direct reliefexpansion=0.508 reliefentries=4 reliefconductorwidth=0.254 reliefairgap=0.254
PlaneConnect [All] p2: planeconnectstyle=Relief reliefexpansion=0.508 reliefentries=4 reliefconductorwidth=0.254 reliefairgap=0.254
PolygonConnect [All] p1: connectstyle=Relief reliefconductorwidth=0.254 reliefentries=4 polygonreliefangle="90 Angle"
RoomDefinition CH2 [InComponentClass('CH2')] p1: confinementstyle=ConfineIn formatcopy=TRUE lockcomponents=FALSE outline 71.4,18.32 93.2,18.32 93.2,92.82 71.4,92.82
RoomDefinition CH3 [InComponentClass('CH3')] p2: confinementstyle=ConfineIn formatcopy=TRUE lockcomponents=FALSE outline 98.1,18.32 119.9,18.32 119.9,92.82 98.1,92.82
RoomDefinition CH4 [InComponentClass('CH4')] p3: confinementstyle=ConfineIn formatcopy=TRUE lockcomponents=FALSE outline 124.3,18.32 146.1,18.32 146.1,92.82 124.3,92.82
RoomDefinition CPLD [InComponentClass('CPLD')] p4: confinementstyle=ConfineIn formatcopy=TRUE lockcomponents=FALSE outline 1,0.12 146.9,0.12 146.9,107.02 1,107.02
RoomDefinition Analog [InComponentClass('Analog')] p5: confinementstyle=ConfineIn formatcopy=TRUE lockcomponents=FALSE outline 20.7,25.42 142.9,25.42 142.9,105.62 20.7,105.62
RoomDefinition CH1 [InComponentClass('CH1')] p6: confinementstyle=ConfineIn formatcopy=FALSE lockcomponents=FALSE outline 44.8,18.32 66.6,18.32 66.6,92.82 44.8,92.82
RoutingVias [All] p1: holewidth=0.254 width=0.61 viastyle="Through Hole" minholewidth=0.254 minwidth=0.61 maxholewidth=0.635 maxwidth=1.27
RoutingVias "Dig 5V/Gnd via" [(InNet('+5') OR InNet('D'))] p2: holewidth=0.711 width=1.27 viastyle="Through Hole" minholewidth=0.711 minwidth=1.27 maxholewidth=0.711 maxwidth=1.27
RoutingVias "Via for Analog power" [(InNet('-5ANA') OR InNet('+5ANA')OR InNet(A)OR InNet('+24V'))] p3: holewidth=0.457 width=0.762 viastyle="Through Hole" minholewidth=0.457 minwidth=0.762 maxholewidth=0.457 maxwidth=0.762
SilkscreenOverComponentPads [All] p1: minsilkscreentomaskgap=0.254
SolderMaskExpansion [All] p1: expansion=0.051
Width Width_1 [All] p1: maxlimit=1.27 minlimit=0.127 preferedwidth=0.127
Width [All] p2: maxlimit=1.27 minlimit=0.127 preferedwidth=0.254
Width "Analog power" [(InNet('-5ANA') OR InNet('+5ANA') OR InNet(A)or InNet('+24V'))] p3: maxlimit=0.381 minlimit=0.381 preferedwidth=0.381
Width "+5V/DGND trace" [(InNet('+5') OR InNet('D'))] p4: maxlimit=1.27 minlimit=0.254 preferedwidth=1.27 midlayer1_minwidth=1.27 bottomlayer_minwidth=1.27 minimp=50.000000 maximp=50.000000 favimp=50.000000
21 further rules are at their usual default settings.

## Classes and differential pairs
component class Analog: C7 C35 C36 C60 C61 D1 D2 D3 D4 D5 D6 R22 R23 R24 R25 R26 R27 SW1 TP8 TP19 TP20 TP21 TP22 TP23 TP24 TP26 U8 U9
component class CH1: C1A C3A C4A C5A C6A C8A C9A C10A C11A C12A C13A C14A C15A C16A C17A C18A C19A C20A C21A C22A C23A C24A C25A C26A C28A C29A C30A C31A C46A C48A C49A L1A L2A L3A L4A Q10A R1A R2A R3A R4A R5A R6A R7A R8A R9A R10A R11A R12A R13A R14A R15A R16A R17A R18A R19A R20A TP1A TP2A TP3A TP4A TP5A TP6A TP7A TP9A TP10A U1A U2A U3A U4A U5A U6A U7A U11A U12A U13A
component class CH2: C1B C3B C4B C5B C6B C8B C9B C10B C11B C12B C13B C14B C15B C16B C17B C18B C19B C20B C21B C22B C23B C24B C25B C26B C28B C29B C30B C31B C46B C48B C49B L1B L2B L3B L4B Q10B R1B R2B R3B R4B R5B R6B R7B R8B R9B R10B R11B R12B R13B R14B R15B R16B R17B R18B R19B R20B TP1B TP2B TP3B TP4B TP5B TP6B TP7B TP9B TP10B U1B U2B U3B U4B U5B U6B U7B U11B U12B U13B
component class CH3: C1C C3C C4C C5C C6C C8C C9C C10C C11C C12C C13C C14C C15C C16C C17C C18C C19C C20C C21C C22C C23C C24C C25C C26C C28C C29C C30C C31C C46C C48C C49C L1C L2C L3C L4C Q10C R1C R2C R3C R4C R5C R6C R7C R8C R9C R10C R11C R12C R13C R14C R15C R16C R17C R18C R19C R20C TP1C TP2C TP3C TP4C TP5C TP6C TP7C TP9C TP10C U1C U2C U3C U4C U5C U6C U7C U11C U12C U13C
component class CH4: C1D C3D C4D C5D C6D C8D C9D C10D C11D C12D C13D C14D C15D C16D C17D C18D C19D C20D C21D C22D C23D C24D C25D C26D C28D C29D C30D C31D C46D C48D C49D L1D L2D L3D L4D Q10D R1D R2D R3D R4D R5D R6D R7D R8D R9D R10D R11D R12D R13D R14D R15D R16D R17D R18D R19D R20D TP1D TP2D TP3D TP4D TP5D TP6D TP7D TP9D TP10D U1D U2D U3D U4D U5D U6D U7D U11D U12D U13D
component class CPLD: C2 C27 C32 C33 C34 C37 C38 C39 C40 C41 C42 C43 C44 C45 C47 C50 C51 C52 C53 C54 C55 C56 C57 C58 C59 J5 L5 P1 P2 P3 Q1 R21 RN1 TP11 TP12 TP13 TP14 TP15 TP16 TP17 TP18 TP25 TP27 TP28 TP29 TP30 TP31 U10 U14 U15
net class DB[0..63]: DB0 DB1 DB2 DB3 DB4 DB5 DB6 DB7 DB8 DB9 DB10 DB11 DB12 DB13 DB14 DB15 DB16 DB17 DB18 DB19 DB20 DB21 DB22 DB23 DB24 DB25 DB26 DB27 DB28 DB29 DB30 DB31 DB32 DB33 DB34 DB35 DB36 DB37 DB38 DB39 DB40 DB41 DB42 DB43 DB44 DB45 DB46 DB47 DB48 DB49 DB50 DB51 DB52 DB53 DB54 DB55 DB56 DB57 DB58 DB59 DB60 DB61 DB62 DB63
channel class Sinistro_ASP_11A: CH1 CH2 CH3 CH4

## Components (designator, comment, footprint, x,y, rotation, side; value= is the part's Value field where it differs from the comment)
C1A "Cap SMD" SMD_0805 61.953,52.586 r90 top (schematic designator C1)
C1B "Cap SMD" SMD_0805 88.553,52.586 r90 top (schematic designator C1)
C1C "Cap SMD" SMD_0805 115.253,52.586 r90 top (schematic designator C1)
C1D "Cap SMD" SMD_0805 141.453,52.586 r90 top (schematic designator C1)
C2 "Cap SMD" SMD_0805 7.954,93.072 r90 bottom
C3A "Cap" SMD_0805 56.854,46.534 r0 bottom (schematic designator C3)
C3B "Cap" SMD_0805 83.454,46.534 r0 bottom (schematic designator C3)
C3C "Cap" SMD_0805 110.154,46.534 r0 bottom (schematic designator C3)
C3D "Cap" SMD_0805 136.354,46.534 r0 bottom (schematic designator C3)
C4A "Cap" SMD_0805 55.407,30.583 r180 bottom (schematic designator C4)
C4B "Cap" SMD_0805 82.007,30.583 r180 bottom (schematic designator C4)
C4C "Cap" SMD_0805 108.707,30.583 r180 bottom (schematic designator C4)
C4D "Cap" SMD_0805 134.907,30.583 r180 bottom (schematic designator C4)
C5A "Cap" SMD_0805 51.343,30.583 r0 bottom (schematic designator C5)
C5B "Cap" SMD_0805 77.943,30.583 r0 bottom (schematic designator C5)
C5C "Cap" SMD_0805 104.643,30.583 r0 bottom (schematic designator C5)
C5D "Cap" SMD_0805 130.843,30.583 r0 bottom (schematic designator C5)
C6A "C0G" 1812 61.699,57.92 r270 top (schematic designator C6)
C6B "C0G" 1812 88.299,57.92 r270 top (schematic designator C6)
C6C "C0G" 1812 114.999,57.92 r270 top (schematic designator C6)
C6D "C0G" 1812 141.199,57.92 r270 top (schematic designator C6)
C7 "Cap SMD" SMD_0805 40.97,57.226 r90 top
C8A "Cap SMD" SMD_0805 52.301,49.843 r90 top (schematic designator C8)
C8B "Cap SMD" SMD_0805 78.901,49.843 r90 top (schematic designator C8)
C8C "Cap SMD" SMD_0805 105.601,49.843 r90 top (schematic designator C8)
C8D "Cap SMD" SMD_0805 131.801,49.843 r90 top (schematic designator C8)
C9A "Cap" SMD_0805 60.487,35.917 r270 bottom (schematic designator C9)
C9B "Cap" SMD_0805 87.087,35.917 r270 bottom (schematic designator C9)
C9C "Cap" SMD_0805 113.787,35.917 r270 bottom (schematic designator C9)
C9D "Cap" SMD_0805 139.987,35.917 r270 bottom (schematic designator C9)
C10A "35V" SMD_CAP_6032 63.281,39.473 r270 bottom (schematic designator C10)
C10B "35V" SMD_CAP_6032 89.881,39.473 r270 bottom (schematic designator C10)
C10C "35V" SMD_CAP_6032 116.581,39.473 r270 bottom (schematic designator C10)
C10D "35V" SMD_CAP_6032 142.781,39.473 r270 bottom (schematic designator C10)
C11A "Cap" SMD_0805 50.758,43.486 r0 bottom (schematic designator C11)
C11B "Cap" SMD_0805 77.358,43.486 r0 bottom (schematic designator C11)
C11C "Cap" SMD_0805 104.058,43.486 r0 bottom (schematic designator C11)
C11D "Cap" SMD_0805 130.258,43.486 r0 bottom (schematic designator C11)
C12A "Cap" SMD_0805 55.171,25.002 r90 top (schematic designator C12)
C12B "Cap" SMD_0805 81.771,25.002 r90 top (schematic designator C12)
C12C "Cap" SMD_0805 108.471,25.002 r90 top (schematic designator C12)
C12D "Cap" SMD_0805 134.671,25.002 r90 top (schematic designator C12)
C13A "Cap" SMD_0805 52.105,40.489 r90 bottom (schematic designator C13)
C13B "Cap" SMD_0805 78.705,40.489 r90 bottom (schematic designator C13)
C13C "Cap" SMD_0805 105.405,40.489 r90 bottom (schematic designator C13)
C13D "Cap" SMD_0805 131.605,40.489 r90 bottom (schematic designator C13)
C14A "Cap" SMD_0805 48.472,39.422 r180 bottom (schematic designator C14)
C14B "Cap" SMD_0805 75.072,39.422 r180 bottom (schematic designator C14)
C14C "Cap" SMD_0805 101.772,39.422 r180 bottom (schematic designator C14)
C14D "Cap" SMD_0805 127.972,39.422 r180 bottom (schematic designator C14)
C15A "Cap Pol" SMD_CAP_3216 55.915,39.219 r0 bottom (schematic designator C15)
C15B "Cap Pol" SMD_CAP_3216 82.6,39.3 r0 bottom (schematic designator C15)
C15C "Cap Pol" SMD_CAP_3216 109.3,39.3 r0 bottom (schematic designator C15)
C15D "Cap Pol" SMD_CAP_3216 135.415,39.219 r0 bottom (schematic designator C15)
C16A "Cap Pol" SMD_CAP_3216 56.372,62.181 r90 bottom (schematic designator C16)
C16B "Cap Pol" SMD_CAP_3216 82.972,62.181 r90 bottom (schematic designator C16)
C16C "Cap Pol" SMD_CAP_3216 109.672,62.181 r90 bottom (schematic designator C16)
C16D "Cap Pol" SMD_CAP_3216 135.872,62.181 r90 bottom (schematic designator C16)
C17A "Cap SMD" SMD_0805 63.985,23.681 r90 top (schematic designator C17)
C17B "Cap SMD" SMD_0805 90.585,23.681 r90 top (schematic designator C17)
C17C "Cap SMD" SMD_0805 117.285,23.681 r90 top (schematic designator C17)
C17D "Cap SMD" SMD_0805 143.485,23.681 r90 top (schematic designator C17)
C18A "Cap" SMD_0805 58.404,63.959 r270 bottom (schematic designator C18)
C18B "Cap" SMD_0805 85.004,63.959 r270 bottom (schematic designator C18)
C18C "Cap" SMD_0805 111.704,63.959 r270 bottom (schematic designator C18)
C18D "Cap" SMD_0805 137.904,63.959 r270 bottom (schematic designator C18)
C19A "Cap" SMD_0805 56.372,67.769 r90 bottom (schematic designator C19)
C19B "Cap" SMD_0805 82.972,67.769 r90 bottom (schematic designator C19)
C19C "Cap" SMD_0805 109.672,67.769 r90 bottom (schematic designator C19)
C19D "Cap" SMD_0805 135.872,67.769 r90 bottom (schematic designator C19)
C20A "Cap" SMD_0805 54.899,76.862 r90 bottom (schematic designator C20)
C20B "Cap" SMD_0805 81.499,76.862 r90 bottom (schematic designator C20)
C20C "Cap" SMD_0805 108.199,76.862 r90 bottom (schematic designator C20)
C20D "Cap" SMD_0805 134.399,76.862 r90 bottom (schematic designator C20)
C21A "Cap Pol" SMD_CAP_3216 60.995,77.624 r90 bottom (schematic designator C21)
C21B "Cap Pol" SMD_CAP_3216 87.595,77.624 r90 bottom (schematic designator C21)
C21C "Cap Pol" SMD_CAP_3216 114.295,77.624 r90 bottom (schematic designator C21)
C21D "Cap Pol" SMD_CAP_3216 140.495,77.624 r90 bottom (schematic designator C21)
C22A "Cap" SMD_0805 60.233,84.736 r270 bottom (schematic designator C22)
C22B "Cap" SMD_0805 86.833,84.736 r270 bottom (schematic designator C22)
C22C "Cap" SMD_0805 113.533,84.736 r270 bottom (schematic designator C22)
C22D "Cap" SMD_0805 139.733,84.736 r270 bottom (schematic designator C22)
C23A "Cap" SMD_0805 64.297,80.672 r180 bottom (schematic designator C23)
C23B "Cap" SMD_0805 90.897,80.672 r180 bottom (schematic designator C23)
C23C "Cap" SMD_0805 117.597,80.672 r180 bottom (schematic designator C23)
C23D "Cap" SMD_0805 143.797,80.672 r180 bottom (schematic designator C23)
C24A "Cap Pol" SMD_CAP_3216 53.375,82.45 r0 bottom (schematic designator C24)
C24B "Cap Pol" SMD_CAP_3216 79.975,82.45 r0 bottom (schematic designator C24)
C24C "Cap Pol" SMD_CAP_3216 106.675,82.45 r0 bottom (schematic designator C24)
C24D "Cap Pol" SMD_CAP_3216 132.875,82.45 r0 bottom (schematic designator C24)
C25A "Cap" SMD_0805 53.629,80.418 r0 bottom (schematic designator C25)
C25B "Cap" SMD_0805 80.229,80.418 r0 bottom (schematic designator C25)
C25C "Cap" SMD_0805 106.929,80.418 r0 bottom (schematic designator C25)
C25D "Cap" SMD_0805 133.129,80.418 r0 bottom (schematic designator C25)
C26A "Cap" SMD_0805 64.855,64.34 r270 bottom (schematic designator C26)
C26B "Cap" SMD_0805 91.455,64.34 r270 bottom (schematic designator C26)
C26C "Cap" SMD_0805 118.155,64.34 r270 bottom (schematic designator C26)
C26D "Cap" SMD_0805 144.355,64.34 r270 bottom (schematic designator C26)
C27 "Cap SMD" SMD_0805 4.652,92.945 r90 bottom
C28A "Cap" SMD_0805 62.061,66.626 r90 bottom (schematic designator C28)
C28B "Cap" SMD_0805 88.661,66.626 r90 bottom (schematic designator C28)
C28C "Cap" SMD_0805 115.361,66.626 r90 bottom (schematic designator C28)
C28D "Cap" SMD_0805 141.561,66.626 r90 bottom (schematic designator C28)
C29A "Cap" SMD_0805 53.629,89.562 r0 bottom (schematic designator C29)
C29B "Cap" SMD_0805 80.229,89.562 r0 bottom (schematic designator C29)
C29C "Cap" SMD_0805 106.929,89.562 r0 bottom (schematic designator C29)
C29D "Cap" SMD_0805 133.129,89.562 r0 bottom (schematic designator C29)
C30A "Cap Pol" SMD_CAP_3216 53.375,86.768 r0 bottom (schematic designator C30)
C30B "Cap Pol" SMD_CAP_3216 79.975,86.768 r0 bottom (schematic designator C30)
C30C "Cap Pol" SMD_CAP_3216 106.675,86.768 r0 bottom (schematic designator C30)
C30D "Cap Pol" SMD_CAP_3216 132.875,86.768 r0 bottom (schematic designator C30)
C31A "Cap Pol" SMD_CAP_3216 64.855,69.42 r90 bottom (schematic designator C31)
C31B "Cap Pol" SMD_CAP_3216 91.455,69.42 r90 bottom (schematic designator C31)
C31C "Cap Pol" SMD_CAP_3216 118.155,69.42 r90 bottom (schematic designator C31)
C31D "Cap Pol" SMD_CAP_3216 144.355,69.42 r90 bottom (schematic designator C31)
C32 "15V" SMD_CAP_3216 4.597,96.266 r0 bottom
C33 "Cap SMD" SMD_0805 7.747,46.939 r90 bottom
C34 "Cap SMD" SMD_0805 29.616,84.734 r0 bottom
C35 "Cap SMD" SMD_0805 27.94,38.1 r180 bottom
C36 "Cap SMD" SMD_0805 21.59,43.18 r90 bottom
C37 "Cap SMD" SMD_0805 16.18,84.709 r180 bottom
C38 "Cap SMD" SMD_0805 16.205,76.759 r180 bottom
C39 "Cap SMD" SMD_0805 19.304,87.859 r180 bottom
C40 "Cap SMD" SMD_0805 16.205,79.731 r180 bottom
C41 "Cap SMD" SMD_0805 23.139,86.792 r90 bottom
C42 "Cap SMD" SMD_0805 23.647,73.076 r270 bottom
C43 "Cap SMD" SMD_0805 29.769,79.756 r0 bottom
C44 "15V" SMD_CAP_3216 29.159,82.144 r0 bottom
C45 "15V" SMD_CAP_3216 16.637,82.474 r180 bottom
C46A "Cap" SMD_0805 49.228,49.919 r90 top (schematic designator C46)
C46B "Cap" SMD_0805 75.828,49.919 r90 top (schematic designator C46)
C46C "Cap" SMD_0805 102.528,49.919 r90 top (schematic designator C46)
C46D "Cap" SMD_0805 128.728,49.919 r90 top (schematic designator C46)
C47 "Cap SMD" SMD_0805 18.644,73.101 r270 bottom
C48A "Cap Pol" SMD_CAP_3216 57.693,77.624 r90 bottom (schematic designator C48)
C48B "Cap Pol" SMD_CAP_3216 84.293,77.624 r90 bottom (schematic designator C48)
C48C "Cap Pol" SMD_CAP_3216 110.993,77.624 r90 bottom (schematic designator C48)
C48D "Cap Pol" SMD_CAP_3216 137.193,77.624 r90 bottom (schematic designator C48)
C49A "Cap SMD" SMD_0805 58.88,77.504 r0 top (schematic designator C49)
C49B "Cap SMD" SMD_0805 85.48,77.504 r0 top (schematic designator C49)
C49C "Cap SMD" SMD_0805 112.18,77.504 r0 top (schematic designator C49)
C49D "Cap SMD" SMD_0805 138.38,77.504 r0 top (schematic designator C49)
C50 "Cap SMD" SMD_0805 29.82,75.743 r0 bottom
C51 "Cap SMD" SMD_0805 27.635,73.05 r270 bottom
C52 "Cap SMD" SMD_0805 29.312,87.833 r180 bottom
C53 "15V" SMD_CAP_3216 98.704,22.784 r270 bottom
C54 "15V" SMD_CAP_3216 125.019,23.546 r270 top
C55 "15V" SMD_CAP_3216 36.22,9.22 r90 top
C56 "Cap SMD" SMD_0805 42.088,48.463 r180 top
C57 "15V" SMD_CAP_3216 121.336,23.622 r90 top
C58 "15V" SMD_CAP_3216 96.215,22.809 r90 bottom
C59 "35V" SMD_CAP_6032 70.002,23.597 r270 top
C60 "Cap SMD" SMD_0805 28.677,60.884 r270 top
C61 "Cap SMD" SMD_0805 28.677,57.048 r90 top
D1 "LED SMD" SMD_0805_LED 120.75,101.25 r90 top
D2 "LED SMD" SMD_0805_LED 133.25,101.25 r90 top
D3 "LED SMD" SMD_0805_LED 104.75,103.25 r270 top
D4 "LED SMD" SMD_0805_LED 115.25,101.25 r270 top
D5 "LED SMD" SMD_0805_LED 126.75,101.25 r270 top
D6 "LED SMD" SMD_0805_LED 139.5,101.25 r270 top
Designator10 "Comment" "TARGET MECHANICAL 5" -19.152,115.367 r180 top
Designator11 "Comment" "TARGET MECHANICAL 5" -18.186,-14.326 r180 top
Designator12 "Comment" "TARGET MECHANICAL 5" 164.998,118.237 r180 top
Designator14 "Comment" "LCOGT LOGO TOP" 13.818,102.006 r0 top
Designator38 "Comment" "COPYRITE SOL .060" 62,103.25 r0 top
J5 "QMSS-EM-PC4" "QMS EDGE PWR PINS" 85,10 r90 top locked
L1A "Inductor" SMD_1210_INDUCT 56.677,33.631 r180 bottom (schematic designator L1)
L1B "Inductor" SMD_1210_INDUCT 83.277,33.631 r180 bottom (schematic designator L1)
L1C "Inductor" SMD_1210_INDUCT 109.977,33.631 r180 bottom (schematic designator L1)
L1D "Inductor" SMD_1210_INDUCT 136.177,33.631 r180 bottom (schematic designator L1)
L2A "Inductor" SMD_1210_INDUCT 56.169,43.029 r0 bottom (schematic designator L2)
L2B "Inductor" SMD_1210_INDUCT 82.769,43.029 r0 bottom (schematic designator L2)
L2C "Inductor" SMD_1210_INDUCT 109.469,43.029 r0 bottom (schematic designator L2)
L2D "Inductor" SMD_1210_INDUCT 135.669,43.029 r0 bottom (schematic designator L2)
L3A "Inductor" SMD_1210_INDUCT 59.166,68.531 r270 bottom (schematic designator L3)
L3B "Inductor" SMD_1210_INDUCT 85.766,68.531 r270 bottom (schematic designator L3)
L3C "Inductor" SMD_1210_INDUCT 112.466,68.531 r270 bottom (schematic designator L3)
L3D "Inductor" SMD_1210_INDUCT 138.666,68.531 r270 bottom (schematic designator L3)
L4A "Inductor" SMD_1210_INDUCT 62.061,62.054 r90 bottom (schematic designator L4)
L4B "Inductor" SMD_1210_INDUCT 88.661,62.054 r90 bottom (schematic designator L4)
L4C "Inductor" SMD_1210_INDUCT 115.361,62.054 r90 bottom (schematic designator L4)
L4D "Inductor" SMD_1210_INDUCT 141.561,62.054 r90 bottom (schematic designator L4)
L5 "600R" SMD_1206 23.012,81.001 r90 bottom
P1 "Header 10X2" HDR2X10 2.54,83.82 r270 top
P2 "Header 2" HDR1X2 43.51,51.029 r180 top
P3 "Header 5X2" HDR2X5 2.54,50.8 r270 top
Q1 "FDV304P" SMD_SOT23_3 137.16,13.716 r90 top
Q10A "IFN860" TO-71 55.349,56.447 r180 top (schematic designator Q10)
Q10B "IFN860" TO-71 81.949,56.447 r180 top (schematic designator Q10)
Q10C "IFN860" TO-71 108.649,56.447 r180 top (schematic designator Q10)
Q10D "IFN860" TO-71 134.849,56.447 r180 top (schematic designator Q10)
R1A "Vishay" "Vishay 3 pin" 49.329,36.94 r0 top (schematic designator R1)
R1B "Vishay" "Vishay 3 pin" 75.929,36.94 r0 top (schematic designator R1)
R1C "Vishay" "Vishay 3 pin" 102.629,36.94 r0 top (schematic designator R1)
R1D "Vishay" "Vishay 3 pin" 128.829,36.94 r0 top (schematic designator R1)
R2A "Vishay" "vishay 3 pin" 50.599,22.716 r90 top (schematic designator R2)
R2B "Vishay" "vishay 3 pin" 77.199,22.716 r90 top (schematic designator R2)
R2C "Vishay" "vishay 3 pin" 103.899,22.716 r90 top (schematic designator R2)
R2D "Vishay" "vishay 3 pin" 130.099,22.716 r90 top (schematic designator R2)
R3A "Res SMD" SMD_0805 60.258,52.554 r90 top (schematic designator R3)
R3B "Res SMD" SMD_0805 86.858,52.554 r90 top (schematic designator R3)
R3C "Res SMD" SMD_0805 113.558,52.554 r90 top (schematic designator R3)
R3D "Res SMD" SMD_0805 139.758,52.554 r90 top (schematic designator R3)
R4A "Res SMD" SMD_0805 54.079,49.843 r90 top (schematic designator R4)
R4B "Res SMD" SMD_0805 80.679,49.843 r90 top (schematic designator R4)
R4C "Res SMD" SMD_0805 107.379,49.843 r90 top (schematic designator R4)
R4D "Res SMD" SMD_0805 133.579,49.843 r90 top (schematic designator R4)
R5A "Vishay" "Vishay 3 pin" 49.761,46.287 r0 top (schematic designator R5)
R5B "Vishay" "Vishay 3 pin" 76.361,46.287 r0 top (schematic designator R5)
R5C "Vishay" "Vishay 3 pin" 103.061,46.287 r0 top (schematic designator R5)
R5D "Vishay" "Vishay 3 pin" 129.261,46.287 r0 top (schematic designator R5)
R6A "Res SMD" SMD_0805 62.715,37.397 r270 top (schematic designator R6)
R6B "Res SMD" SMD_0805 89.315,37.397 r270 top (schematic designator R6)
R6C "Res SMD" SMD_0805 116.015,37.397 r270 top (schematic designator R6)
R6D "Res SMD" SMD_0805 142.215,37.397 r270 top (schematic designator R6)
R7A "Res SMD" SMD_0805 64.493,37.397 r270 top (schematic designator R7)
R7B "Res SMD" SMD_0805 91.093,37.397 r270 top (schematic designator R7)
R7C "Res SMD" SMD_0805 117.793,37.397 r270 top (schematic designator R7)
R7D "Res SMD" SMD_0805 143.993,37.397 r270 top (schematic designator R7)
R8A "Vishay" "VISHAY 6 pin" 49.761,69.147 r270 top (schematic designator R8)
R8B "Vishay" "VISHAY 6 pin" 76.361,69.147 r270 top (schematic designator R8)
R8C "Vishay" "VISHAY 6 pin" 103.061,69.147 r270 top (schematic designator R8)
R8D "Vishay" "VISHAY 6 pin" 129.261,69.147 r270 top (schematic designator R8)
R9A "Res SMD" SMD_0805 63.223,41.207 r180 top (schematic designator R9)
R9B "Res SMD" SMD_0805 89.823,41.207 r180 top (schematic designator R9)
R9C "Res SMD" SMD_0805 116.523,41.207 r180 top (schematic designator R9)
R9D "Res SMD" SMD_0805 142.723,41.207 r180 top (schematic designator R9)
R10A "Res SMD" SMD_0805 56.949,25.002 r90 top (schematic designator R10)
R10B "Res SMD" SMD_0805 83.549,25.002 r90 top (schematic designator R10)
R10C "Res SMD" SMD_0805 110.249,25.002 r90 top (schematic designator R10)
R10D "Res SMD" SMD_0805 136.449,25.002 r90 top (schematic designator R10)
R11A "Res SMD" SMD_0805 55.857,19.363 r0 top (schematic designator R11)
R11B "Res SMD" SMD_0805 82.457,19.363 r0 top (schematic designator R11)
R11C "Res SMD" SMD_0805 109.157,19.363 r0 top (schematic designator R11)
R11D "Res SMD" SMD_0805 135.357,19.363 r0 top (schematic designator R11)
R12A "Res SMD" SMD_0805 50.269,61.527 r270 top (schematic designator R12)
R12B "Res SMD" SMD_0805 76.869,61.527 r270 top (schematic designator R12)
R12C "Res SMD" SMD_0805 103.569,61.527 r270 top (schematic designator R12)
R12D "Res SMD" SMD_0805 129.769,61.527 r270 top (schematic designator R12)
R13A "Res SMD" SMD_0805 53.393,24.24 r90 top (schematic designator R13)
R13B "Res SMD" SMD_0805 79.993,24.24 r90 top (schematic designator R13)
R13C "Res SMD" SMD_0805 106.693,24.24 r90 top (schematic designator R13)
R13D "Res SMD" SMD_0805 132.893,24.24 r90 top (schematic designator R13)
R14A "Res SMD" SMD_0805 62.283,24.494 r270 top (schematic designator R14)
R14B "Res SMD" SMD_0805 88.883,24.494 r270 top (schematic designator R14)
R14C "Res SMD" SMD_0805 115.583,24.494 r270 top (schematic designator R14)
R14D "Res SMD" SMD_0805 141.783,24.494 r270 top (schematic designator R14)
R15A "Res SMD" SMD_0805 47.729,61.527 r90 top (schematic designator R15)
R15B "Res SMD" SMD_0805 74.329,61.527 r90 top (schematic designator R15)
R15C "Res SMD" SMD_0805 101.029,61.527 r90 top (schematic designator R15)
R15D "Res SMD" SMD_0805 127.229,61.527 r90 top (schematic designator R15)
R16A "Res SMD" SMD_0805 47.45,49.919 r270 top (schematic designator R16)
R16B "Res SMD" SMD_0805 74.05,49.919 r270 top (schematic designator R16)
R16C "Res SMD" SMD_0805 100.75,49.919 r270 top (schematic designator R16)
R16D "Res SMD" SMD_0805 126.95,49.919 r270 top (schematic designator R16)
R17A "Res SMD" SMD_0805 61.013,36.94 r270 top (schematic designator R17)
R17B "Res SMD" SMD_0805 87.613,36.94 r270 top (schematic designator R17)
R17C "Res SMD" SMD_0805 114.313,36.94 r270 top (schematic designator R17)
R17D "Res SMD" SMD_0805 140.513,36.94 r270 top (schematic designator R17)
R18A "Res SMD" SMD_0805 55.298,74.481 r0 top (schematic designator R18)
R18B "Res SMD" SMD_0805 81.898,74.481 r0 top (schematic designator R18)
R18C "Res SMD" SMD_0805 108.598,74.481 r0 top (schematic designator R18)
R18D "Res SMD" SMD_0805 134.798,74.481 r0 top (schematic designator R18)
R19A "Res SMD" SMD_0805 62.41,74.227 r180 top (schematic designator R19)
R19B "Res SMD" SMD_0805 89.01,74.227 r180 top (schematic designator R19)
R19C "Res SMD" SMD_0805 115.71,74.227 r180 top (schematic designator R19)
R19D "Res SMD" SMD_0805 141.91,74.227 r180 top (schematic designator R19)
R20A "Res SMD" SMD_0805 60.505,24.494 r90 top (schematic designator R20)
R20B "Res SMD" SMD_0805 87.105,24.494 r90 top (schematic designator R20)
R20C "Res SMD" SMD_0805 113.805,24.494 r90 top (schematic designator R20)
R20D "Res SMD" SMD_0805 140.005,24.494 r90 top (schematic designator R20)
R21 "Res SMD" SMD_0805 7.446,89.643 r0 top
R22 "Res SMD" SMD_0805 101.75,103.25 r270 bottom
R23 "Res SMD" SMD_0805 117.75,101.25 r270 bottom
R24 "Res SMD" SMD_0805 129.5,101.25 r270 bottom
R25 "Res SMD" SMD_0805 123.5,101.25 r270 bottom
R26 "Res SMD" SMD_0805 135.75,101.25 r270 bottom
R27 "Res SMD" SMD_0805 142,101.25 r270 bottom
RN1 "RES ARRAY  x4" "RES ARRAY 0603 x 4" 11.43,50.8 r270 top
SW1 "SW-SPST-8POS" "SMD_DIP GULL WING 16PIN" 88.15,95.602 r90 bottom
TP1A "Test point" PAD_80D_052H 64.493,52.383 r0 top (schematic designator TP1)
TP1B "Test point" PAD_80D_052H 91.093,52.383 r0 top (schematic designator TP1)
TP1C "Test point" PAD_80D_052H 117.793,52.383 r0 top (schematic designator TP1)
TP1D "Test point" PAD_80D_052H 143.993,52.383 r0 top (schematic designator TP1)
TP2A "Test point" PAD_80D_052H 65.255,26.983 r0 top (schematic designator TP2)
TP2B "Test point" PAD_80D_052H 91.855,26.983 r0 top (schematic designator TP2)
TP2C "Test point" PAD_80D_052H 118.555,26.983 r0 top (schematic designator TP2)
TP2D "Test point" PAD_80D_052H 144.755,26.983 r0 top (schematic designator TP2)
TP3A "Test point" PAD_80D_052H 59.997,40.75 r0 top (schematic designator TP3)
TP3B "Test point" PAD_80D_052H 86.597,40.75 r0 top (schematic designator TP3)
TP3C "Test point" PAD_80D_052H 113.297,40.75 r0 top (schematic designator TP3)
TP3D "Test point" PAD_80D_052H 139.497,40.75 r0 top (schematic designator TP3)
TP4A "Test point" PAD_80D_052H 46.205,41.969 r0 top (schematic designator TP4)
TP4B "Test point" PAD_80D_052H 72.805,41.969 r0 top (schematic designator TP4)
TP4C "Test point" PAD_80D_052H 99.505,41.969 r0 top (schematic designator TP4)
TP4D "Test point" PAD_80D_052H 125.705,41.969 r0 top (schematic designator TP4)
TP5A "Test point" PAD_80D_052H 59.235,20.684 r0 top (schematic designator TP5)
TP5B "Test point" PAD_80D_052H 85.835,20.684 r0 top (schematic designator TP5)
TP5C "Test point" PAD_80D_052H 112.535,20.684 r0 top (schematic designator TP5)
TP5D "Test point" PAD_80D_052H 138.735,20.684 r0 top (schematic designator TP5)
TP6A "Test point" PAD_80D_052H 52.758,77.275 r0 top (schematic designator TP6)
TP6B "Test point" PAD_80D_052H 79.358,77.275 r0 top (schematic designator TP6)
TP6C "Test point" PAD_80D_052H 106.058,77.275 r0 top (schematic designator TP6)
TP6D "Test point" PAD_80D_052H 132.258,77.275 r0 top (schematic designator TP6)
TP7A "Test point" PAD_80D_052H 64.696,77.021 r0 top (schematic designator TP7)
TP7B "Test point" PAD_80D_052H 91.296,77.021 r0 top (schematic designator TP7)
TP7C "Test point" PAD_80D_052H 117.996,77.021 r0 top (schematic designator TP7)
TP7D "Test point" PAD_80D_052H 144.196,77.021 r0 top (schematic designator TP7)
TP8 "Test point" PAD_80D_052H 43.18,71.12 r0 top
TP9A "Test point" PAD_80D_052H 65.001,57.717 r0 top (schematic designator TP9)
TP9B "Test point" PAD_80D_052H 91.601,57.717 r0 top (schematic designator TP9)
TP9C "Test point" PAD_80D_052H 118.301,57.717 r0 top (schematic designator TP9)
TP9D "Test point" PAD_80D_052H 144.501,57.717 r0 top (schematic designator TP9)
TP10A "Test point" PAD_80D_052H 52.301,91.499 r0 top (schematic designator TP10)
TP10B "Test point" PAD_80D_052H 78.901,91.499 r0 top (schematic designator TP10)
TP10C "Test point" PAD_80D_052H 105.601,91.499 r0 top (schematic designator TP10)
TP10D "Test point" PAD_80D_052H 131.801,91.499 r0 top (schematic designator TP10)
TP11 "Test point" PAD_80D_052H 20.32,34.29 r90 top
TP12 "Test point" PAD_80D_052H 20.32,29.21 r90 top
TP13 "Test point" PAD_80D_052H 20.32,24.13 r90 top
TP14 "AGND" PAD_80D_052H 96.52,50.8 r90 top
TP15 "AGND" PAD_80D_052H 95.174,104.927 r90 top
TP16 "AGND" PAD_80D_052H 145.288,105.359 r90 top
TP17 "AGND" PAD_80D_052H 70.917,79.273 r90 top
TP18 "DGND" PAD_80D_052H 3.81,105.41 r90 top
TP19 "Test point" PAD_80D_052H 124.46,71.12 r90 top
TP20 "Test point" PAD_80D_052H 40.64,33.02 r90 top
TP21 "Test point" PAD_80D_052H 40.64,26.67 r90 top
TP22 "Test point" PAD_80D_052H 67.31,33.02 r90 top
TP23 "Test point" PAD_80D_052H 124.46,76.2 r90 top
TP24 "Test point" PAD_80D_052H 124.46,90.17 r90 top
TP25 "+12V" PAD_80D_052H 114.3,105.41 r90 top
TP26 "Test point" PAD_80D_052H 124.46,82.55 r90 top
TP27 "+5ANA" PAD_80D_052H 127,105.41 r90 top
TP28 "+28V" PAD_80D_052H 107.95,105.41 r90 top
TP29 "+3.3V" PAD_80D_052H 139.7,105.41 r90 top
TP30 "-5ANA" PAD_80D_052H 133.35,105.41 r90 top
TP31 "-12V" PAD_80D_052H 120.65,105.41 r90 top
U1A "THS4031" "MSOP with PowerPAD" 56.873,48.827 r180 top (schematic designator U1)
U1B "THS4031" "MSOP with PowerPAD" 83.473,48.827 r180 top (schematic designator U1)
U1C "THS4031" "MSOP with PowerPAD" 110.173,48.827 r180 top (schematic designator U1)
U1D "THS4031" "MSOP with PowerPAD" 136.373,48.827 r180 top (schematic designator U1)
U2A "DG642" 182H_M 62.207,46.033 r270 top (schematic designator U2)
U2B "DG642" 182H_M 88.807,46.033 r270 top (schematic designator U2)
U2C "DG642" 182H_M 115.507,46.033 r270 top (schematic designator U2)
U2D "DG642" 182H_M 141.707,46.033 r270 top (schematic designator U2)
U3A "DG213A" SOIC16 53.393,30.844 r180 top (schematic designator U3)
U3B "DG213A" SOIC16 79.993,30.844 r180 top (schematic designator U3)
U3C "DG213A" SOIC16 106.693,30.844 r180 top (schematic designator U3)
U3D "DG213A" SOIC16 132.893,30.844 r180 top (schematic designator U3)
U4A "THS4031" "MSOP with PowerPAD" 49.253,41.715 r180 top (schematic designator U4)
U4B "THS4031" "MSOP with PowerPAD" 75.853,41.715 r180 top (schematic designator U4)
U4C "THS4031" "MSOP with PowerPAD" 102.553,41.715 r180 top (schematic designator U4)
U4D "THS4031" "MSOP with PowerPAD" 128.753,41.715 r180 top (schematic designator U4)
U5A "THS4031" "MSOP with PowerPAD" 56.441,36.94 r270 top (schematic designator U5)
U5B "THS4031" "MSOP with PowerPAD" 83.041,36.94 r270 top (schematic designator U5)
U5C "THS4031" "MSOP with PowerPAD" 109.741,36.94 r270 top (schematic designator U5)
U5D "THS4031" "MSOP with PowerPAD" 135.941,36.94 r270 top (schematic designator U5)
U6A "0.2 ppm" TQFP48_m 58.981,84.489 r90 top (schematic designator U6)
U6B "0.2 ppm" TQFP48_m 85.581,84.489 r90 top (schematic designator U6)
U6C "0.2 ppm" TQFP48_m 112.281,84.489 r90 top (schematic designator U6)
U6D "0.2 ppm" TQFP48_m 138.481,84.489 r90 top (schematic designator U6)
U7A "THS4151" 182H_M 60.708,66.251 r270 top (schematic designator U7)
U7B "THS4151" 182H_M 87.308,66.251 r270 top (schematic designator U7)
U7C "THS4151" 182H_M 114.008,66.251 r270 top (schematic designator U7)
U7D "THS4151" 182H_M 140.208,66.251 r270 top (schematic designator U7)
U8 "4.096V +/-0.5ppm" NSO8_M 34.9,59.004 r0 top
U9 "MAX1258" QFN48_M 25.4,41.91 r0 top
U10 "FIN1002M5" SMD_SOT23_5 7.954,92.945 r90 top
U11A "SSM2210" SO-8_M 48.364,55.863 r270 top (schematic designator U11)
U11B "SSM2210" SO-8_M 74.964,55.863 r270 top (schematic designator U11)
U11C "SSM2210" SO-8_M 101.664,55.863 r270 top (schematic designator U11)
U11D "SSM2210" SO-8_M 127.864,55.863 r270 top (schematic designator U11)
U12A "BAS70DW-04" SOT-363 58.854,74.481 r0 top (schematic designator U12)
U12B "BAS70DW-04" SOT-363 85.454,74.481 r0 top (schematic designator U12)
U12C "BAS70DW-04" SOT-363 112.154,74.481 r0 top (schematic designator U12)
U12D "BAS70DW-04" SOT-363 138.354,74.481 r0 top (schematic designator U12)
U13A "SSM2210" SO-8_M 61.775,30.844 r270 top (schematic designator U13)
U13B "SSM2210" SO-8_M 88.375,30.844 r270 top (schematic designator U13)
U13C "SSM2210" SO-8_M 115.075,30.844 r270 top (schematic designator U13)
U13D "SSM2210" SO-8_M 141.275,30.844 r270 top (schematic designator U13)
U14 "EPM570T144C3" TQFP144_L 22.9,80 r0 top
U15 "DS2411" SMD_SOT23_3 132.842,13.716 r90 top

## Footprints (in the part's own frame and the unit in brackets; to place one, negate y for a bottom-side part, rotate by r counter-clockwise, add the part's x,y. Pads: shape width x height; smd on the part's side, far side on the other; paste and mask are expansions set on the pad)
182H_M [mm] "8-Pin Small Outline Integrated Circuit 1.27 mm Pitch, IPC Low Density"
  oval 2.5x0.7 smd: 1(-2.45,1.905) 2(-2.45,0.635) 3(-2.45,-0.635) 4(-2.45,-1.905) 5(2.45,-1.905) 6(2.45,-0.635) 7(2.45,0.635) 8(2.45,1.905)
  silkscreen extent -2.57,-2.5 0.8,2.93, body extent -2,-2.5 2,2.5, height 1.75
1812 [mm] "Chip Capacitor; Body 4.5 x 3.2 mm (LxW typ)"
  rect 1.9x3.4 smd: 1(-1.95,0) 2(1.95,0)
  silkscreen extent -0.7,-1.6 0.7,1.6
"COPYRITE SOL .060" [mm]
  Bottom Layer (.GBL) circle w0.254: c0,0 r1.651
  Bottom Layer (.GBL) lines w0.305: -0.66,-0.381 ccw(c0,0) -0.66,0.381
HDR1X2 [mm] "Connector; Header; 2 Position"
  rect 1.5x1.5 hole 0.9: 1(0,0)
  round 1.5 hole 0.9: 2(2.54,0)
  silkscreen extent -1.27,-1.27 3.81,1.27
HDR2X5 [mm] "Connector; Header; 5x2 Position"
  rect 1.5x1.5 hole 0.9: 1(0,0)
  round 1.5 hole 0.9: 2(0,2.54) 3(2.54,0) 4(2.54,2.54) 5(5.08,0) 6(5.08,2.54) 7(7.62,0) 8(7.62,2.54) 9(10.16,0) 10(10.16,2.54)
  silkscreen extent -1.27,-1.27 11.43,3.81
HDR2X10 [mm] "Connector; Header; 10x2 Position"
  rect 1.5x1.5 hole 0.9: 1(0,0)
  round 1.5 hole 0.9: 2(0,2.54) 3(2.54,0) 4(2.54,2.54) 5(5.08,0) 6(5.08,2.54) 7(7.62,0) 8(7.62,2.54) 9(10.16,0) 10(10.16,2.54) 11(12.7,0) 12(12.7,2.54) 13(15.24,0) 14(15.24,2.54) 15(17.78,0) 16(17.78,2.54) 17(20.32,0) 18(20.32,2.54) 19(22.86,0) 20(22.86,2.54)
  silkscreen extent -1.27,-1.27 24.13,3.81
"LCOGT LOGO TOP" [mm]
  Top Layer (.GTL) circle w0.127: c0.508,0 r1.702
  Top Layer (.GTL) lines w0.127: -1.194,0 2.21,0 ; -0.864,-0.991 1.88,-0.991 ; -0.864,0.991 1.88,0.991 ; 0.279,-1.651 cw(c1.567,-0.363) -0.254,-0.363 -0.254,0 -0.254,0.363 cw(c1.567,0.363) 0.279,1.651 ; 0.508,-1.702 0.508,1.702 0.584,1.702 ; 0.737,-1.651 ccw(c-0.551,-0.363) 1.27,-0.363 1.27,0 1.27,0.363 ccw(c-0.551,0.363) 0.737,1.651
  Top Layer (.GTL) keep-out lines w0.127: -6.35,-0.762 ccw(c-5.588,-0.762) -5.588,-1.524 -1.524,-1.524 ccw(c0.508,0) 2.54,-1.524 4.826,-1.524 ccw(c4.826,-0.762) 5.588,-0.762 5.588,0.762 ccw(c4.826,0.762) 4.826,1.524 2.54,1.524 ccw(c0.508,0) -1.524,1.524 -5.334,1.524 ccw(c-5.334,0.508) -6.35,0.508 -6.35,0 -6.35,-0.762
"MSOP with PowerPAD" [mm] "Shrink Small Outline, MSOP; 8 Leads; Body Width 3 mm; Pitch 0.65 mm"
  round 0.508 hole 0.254 paste+0 mask+0: 0(-0.5,0.5) 0(-0.5,-0.5) 0(0,0) 0(0.5,0.5) 0(0.5,-0.5)
  rect 1.89x1.57 smd: 0(0,0)
  rect 0.4x1.55 smd: 1(-0.975,-2.075) 2(-0.325,-2.075) 3(0.325,-2.075) 4(0.975,-2.075) 5(0.975,2.075) 6(0.325,2.075) 7(-0.325,2.075) 8(-0.975,2.075)
  silkscreen extent -1.85,-2.2 1.55,0.9
NSO8_M [mm] "8-Pin Small Outline Integrated Circuit 1.27 mm Pitch, IPC Low Density"
  oval 2.5x0.7 smd: 1(-2.45,1.905) 2(-2.45,0.635) 3(-2.45,-0.635) 4(-2.45,-1.905) 5(2.45,-1.905) 6(2.45,-0.635) 7(2.45,0.635) 8(2.45,1.905)
  silkscreen extent -2.57,-2.5 0.8,2.93, body extent -2,-2.5 2,2.5, height 1.75
PAD_80D_052H [mil]
  round 80 hole 52: 1(0,0)
QFN48_M [mm] "QFN, 48-Leads, Body 7x7mm, Pitch 0.5mm, IPC Low Density"
  round 0.66 hole 0.33 mask+0: 0(0,0)
  round 0.66 hole 0.33: 0(0,1.2) 0(0,3.6) 0(0,4.8) 0(1.2,0) 0(1.2,1.2) 0(1.2,2.4) 0(1.2,4.8) 0(2.4,0) 0(2.4,1.2) 0(2.4,2.4) 0(2.4,3.6) 0(2.4,4.8) 0(3.6,0) 0(3.6,1.2) 0(3.6,2.4) 0(3.6,3.6) 0(3.6,4.8) 0(4.8,0) 0(4.8,1.2) 0(4.8,2.4) 0(4.8,3.6) 0(4.8,4.8)
  round 0.66 hole 0.33 paste+0 mask+0: 0(0,2.4) 0(1.2,3.6)
  rect 5.8x5.8 smd: 0(2.4,2.4)
  oval 0.85x0.2 smd: 1(-1.175,5.15) 2(-1.175,4.65) 3(-1.175,4.15) 4(-1.175,3.65) 5(-1.175,3.15) 6(-1.175,2.65) 7(-1.175,2.15) 8(-1.175,1.65) 9(-1.175,1.15) 10(-1.175,0.65) 11(-1.175,0.15) 12(-1.175,-0.35) 25(5.975,-0.35) 26(5.975,0.15) 27(5.975,0.65) 28(5.975,1.15) 29(5.975,1.65) 30(5.975,2.15) 31(5.975,2.65) 32(5.975,3.15) 33(5.975,3.65) 34(5.975,4.15) 35(5.975,4.65) 36(5.975,5.15)
  oval 0.2x0.85 smd: 13(-0.35,-1.175) 14(0.15,-1.175) 15(0.65,-1.175) 16(1.15,-1.175) 17(1.65,-1.175) 18(2.15,-1.175) 19(2.65,-1.175) 20(3.15,-1.175) 21(3.65,-1.175) 22(4.15,-1.175) 23(4.65,-1.175) 24(5.15,-1.175) 37(5.15,5.975) 38(4.65,5.975) 39(4.15,5.975) 40(3.65,5.975) 41(3.15,5.975) 42(2.65,5.975) 43(2.15,5.975) 44(1.65,5.975) 45(1.15,5.975) 46(0.65,5.975) 47(0.15,5.975) 48(-0.35,5.975)
  silkscreen extent -2.27,-1.2 6,6, body extent -1.17,-1.18 5.97,5.97, height 0.9
"QMS EDGE PWR PINS" [mil] "78 pos (156 pin) + 8 pwr pins"
  rect 60x14 smd mask+0: 0(69.15,-552.45) 1(69.15,-1152.45) 3(69.15,-1127.45) 5(69.15,-1102.45) 7(69.15,-1077.45) 9(69.15,-1052.45) 11(69.15,-1027.45) 13(69.15,-1002.45) 15(69.15,-977.45) 17(69.15,-952.45) 19(69.15,-927.45) 21(69.15,-902.45) 23(69.15,-877.45) 25(69.15,-852.45) 27(69.15,-827.45) 29(69.15,-802.45) 31(69.15,-777.45) 33(69.15,-752.45) 35(69.15,-727.45) 37(69.15,-702.45) 39(69.15,-677.45) 41(69.15,-652.45) 43(69.15,-627.45) 45(69.15,-602.45) 47(69.15,-577.45) 51(69.15,-527.45) 53(68.09,-312.11) 55(68.09,-287.11) 57(68.09,-262.11) 59(68.09,-237.11) 61(68.09,-212.11) 63(68.09,-187.11) 65(68.09,-162.11) 67(68.09,-137.11) 69(68.09,-112.11) 71(68.09,-87.11) 73(68.09,-62.11) 75(68.09,-37.11) 77(68.09,-12.11) 79(68.09,12.89) 81(68.09,37.89) 83(68.09,62.89) 85(68.09,87.89) 87(68.09,112.89) 89(68.09,137.89) 91(68.09,162.89) 93(68.09,187.89) 95(68.09,212.89) 97(68.09,237.89) 99(68.09,262.89) 101(68.09,287.89) 103(68.09,312.89) 105(68.09,528.05) 107(68.09,553.05) 109(68.09,578.05) 111(68.09,603.05) 113(68.09,628.05) 115(68.09,653.05) 117(68.09,678.05) 119(68.09,703.05) 121(68.09,728.05) 123(68.09,753.05) 125(68.09,778.05) 127(68.09,803.05) 129(68.09,828.05) 131(68.09,853.05) 133(68.09,878.05) 135(68.09,903.05) 137(68.09,928.05) 139(68.09,953.05) 141(68.09,978.05) 143(68.09,1003.05) 145(68.09,1028.05) 147(68.09,1053.05) 149(68.09,1078.05) 151(68.09,1103.05) 153(68.09,1128.05) 155(68.09,1153.05)
  rect 60x14 smd far side mask+0: 2(69.15,-1152.45) 4(69.15,-1127.45) 6(69.15,-1102.45) 8(69.15,-1077.45) 10(69.15,-1052.45) 12(69.15,-1027.45) 14(69.15,-1002.45) 16(69.15,-977.45) 18(69.15,-952.45) 20(69.15,-927.45) 22(69.15,-902.45) 24(69.15,-877.45) 26(69.15,-852.45) 28(69.15,-827.45) 30(69.15,-802.45) 32(69.15,-777.45) 34(69.15,-752.45) 36(69.15,-727.45) 38(69.15,-702.45) 40(69.15,-677.45) 42(69.15,-652.45) 44(69.15,-627.45) 46(69.15,-602.45) 48(69.15,-577.45) 50(69.15,-552.45) 52(69.15,-527.45) 54(68.09,-312.11) 56(68.09,-287.11) 58(68.09,-262.11) 60(68.09,-237.11) 62(68.09,-212.11) 64(68.09,-187.11) 66(68.09,-162.11) 68(68.09,-137.11) 70(68.09,-112.11) 72(68.09,-87.11) 74(68.09,-62.11) 76(68.09,-37.11) 78(68.09,-12.11) 80(68.09,12.89) 82(68.09,37.89) 84(68.09,62.89) 86(68.09,87.89) 88(68.09,112.89) 90(68.09,137.89) 92(68.09,162.89) 94(68.09,187.89) 96(68.09,212.89) 98(68.09,237.89) 100(68.09,262.89) 102(68.09,287.89) 104(68.09,312.89) 106(68.09,528.05) 108(68.09,553.05) 110(68.09,578.05) 112(68.09,603.05) 114(68.09,628.05) 116(68.09,653.05) 118(68.09,678.05) 120(68.09,703.05) 122(68.09,728.05) 124(68.09,753.05) 126(68.09,778.05) 128(68.09,803.05) 130(68.09,828.05) 132(68.09,853.05) 134(68.09,878.05) 136(68.09,903.05) 138(68.09,928.05) 140(68.09,953.05) 142(68.09,978.05) 144(68.09,1003.05) 146(68.09,1028.05) 148(68.09,1053.05) 150(68.09,1078.05) 152(68.09,1103.05) 154(68.09,1128.05) 156(68.09,1153.05)
  rect 60x31 smd mask+0: 157(41.09,-1229.45) 159(41.09,-489.45) 161(41.09,-389.45) 163(41.09,350.55) 165(41.09,450.55) 167(41.09,1190.55)
  rect 60x31 smd far side mask+0: 158(41.09,-1189.45) 160(41.09,-449.45) 162(41.09,-349.45) 164(41.09,390.55) 166(41.09,490.55) 168(41.09,1230.55)
  rect 100x30 smd mask+0: PC01(59.65,-1444.45) PC03(59.65,-1365.55) PC05(59.15,1365.55) PC07(59.15,1444.45)
  rect 100x30 smd far side mask+0: PC02(59.65,-1444.45) PC04(59.65,-1365.55) PC06(59.15,1365.55) PC08(59.15,1444.45)
  silkscreen extent -373,-1649 217,1647
"RES ARRAY 0603 x 4" [mm]
  rect 0.44x1.15 smd: 1(0,0.1) 2(0,2.05) 3(0.8,0.1) 4(0.8,2.05) 5(1.6,0.1) 6(1.6,2.05) 7(2.4,0.1) 8(2.4,2.05)
  silkscreen extent -0.6,-0.6 3,1.8
SMD_0805 [mil]
  rect 50x50 smd: 1(-45,0) 2(45,0)
  silkscreen extent -1,-1 1,1
SMD_0805_LED [mil]
  rect 50x50 smd: ANOD(-45,0) CATH(45,0)
  silkscreen extent -60,40 60,70
SMD_1206 [mil]
  rect 63x75 smd: 1(-55,0) 2(55,0)
SMD_1210_INDUCT [mil]
  rect 60x86 smd: 1(-65,0) 2(65,0)
  silkscreen extent -73,-62 73,62
SMD_CAP_3216 [mil]
  rect 78x48 smd: 1(55,0) 2(-55,0)
  silkscreen extent -108,-65 134,38
SMD_CAP_6032 [mil]
  rect 100x100 smd: NEG(-115,0) POS(115,0)
  silkscreen extent -179,-110 195,64
"SMD_DIP GULL WING 16PIN" [mm]
  rect 2.44x1.13 smd: 1(0,0) 2(0,-2.54) 3(0,-5.08) 4(0,-7.62) 5(0,-10.16) 6(0,-12.7) 7(0,-15.24) 8(0,-17.78) 9(8.611,-17.78) 10(8.611,-15.24) 11(8.611,-12.7) 12(8.611,-10.16) 13(8.611,-7.62) 14(8.611,-5.08) 15(8.611,-2.54) 16(8.611,0)
  silkscreen extent -1.14,-19.84 8.64,1.52
SMD_SOT23_3 [mil]
  rect 36x36 smd: 1(-37,-43) 2(37,-43) 3(0,43)
  silkscreen extent -57,-25 57,25
SMD_SOT23_5 [mil]
  rect 28x36 smd: 1(37,43) 2(0,43) 3(-37,43)
  rect 36x36 smd: 4(-37,-43) 5(37,-43)
  silkscreen extent -57,-25 57,85
SO-8_M [mm] "8-Pin Small Outline Integrated Circuit 1.27 mm Pitch, IPC Low Density"
  oval 2.5x0.7 smd: 1(-2.45,1.905) 2(-2.45,0.635) 3(-2.45,-0.635) 4(-2.45,-1.905) 5(2.45,-1.905) 6(2.45,-0.635) 7(2.45,0.635) 8(2.45,1.905)
  silkscreen extent -2.57,-2.5 0.8,2.93, body extent -2,-2.5 2,2.5, height 1.75
SOIC16 [mm] "Small Outline; 16 Leads; Body Width 3.9 mm; Pitch 1.27 mm"
  rect 0.6x2.2 smd: 1(-4.445,-2.6) 2(-3.175,-2.6) 3(-1.905,-2.6) 4(-0.635,-2.6) 5(0.635,-2.6) 6(1.905,-2.6) 7(3.175,-2.6) 8(4.445,-2.6) 9(4.445,2.6) 10(3.175,2.6) 11(1.905,2.6) 12(0.635,2.6) 13(-0.635,2.6) 14(-1.905,2.6) 15(-3.175,2.6) 16(-4.445,2.6)
  silkscreen extent -5.42,-2.72 5,1.1
SOT-363 [mm] "SOT-363/SC-88; 6 Leads; Body 2.2 x 2.2 mm, inc. leads (LxW max)"
  rect 0.35x1.25 smd: 1(-0.65,-0.775) 2(0,-0.775) 3(0.65,-0.775) 4(0.65,0.775) 5(0,0.775) 6(-0.65,0.775)
  silkscreen extent -1.2,-1.15 1.15,0.7
"TARGET MECHANICAL 5" [mm]
TO-71 [mil] "Can; 7 Leads (1 Absent); Pin Circle Dia. 2.54 mm; Lead Dia. 0.48 mm (max)"
  rect 40x40 hole 25 rot 22.5: 1(-80,1)
  round 40 hole 25: 2(-58,-56) 3(0,-80) 5(80.62,0) 6(56,56) 7(0,79)
  silkscreen extent -129,-110 110,129
TQFP48_m [mm] "48-Pin Thin Quad Flat Pack 0.5 mm Pitch, IPC Low Density"
  oval 2.1x0.3 smd: 1(-4.1,2.75) 2(-4.1,2.25) 3(-4.1,1.75) 4(-4.1,1.25) 5(-4.1,0.75) 6(-4.1,0.25) 7(-4.1,-0.25) 8(-4.1,-0.75) 9(-4.1,-1.25) 10(-4.1,-1.75) 11(-4.1,-2.25) 12(-4.1,-2.75) 25(4.1,-2.75) 26(4.1,-2.25) 27(4.1,-1.75) 28(4.1,-1.25) 29(4.1,-0.75) 30(4.1,-0.25) 31(4.1,0.25) 32(4.1,0.75) 33(4.1,1.25) 34(4.1,1.75) 35(4.1,2.25) 36(4.1,2.75)
  oval 0.3x2.1 smd: 13(-2.75,-4.1) 14(-2.25,-4.1) 15(-1.75,-4.1) 16(-1.25,-4.1) 17(-0.75,-4.1) 18(-0.25,-4.1) 19(0.25,-4.1) 20(0.75,-4.1) 21(1.25,-4.1) 22(1.75,-4.1) 23(2.25,-4.1) 24(2.75,-4.1) 37(2.75,4.1) 38(2.25,4.1) 39(1.75,4.1) 40(1.25,4.1) 41(0.75,4.1) 42(0.25,4.1) 43(-0.25,4.1) 44(-0.75,4.1) 45(-1.25,4.1) 46(-1.75,4.1) 47(-2.25,4.1) 48(-2.75,4.1)
  silkscreen extent -4.22,-2.65 2.65,3.57, body extent -3.5,-3.5 3.5,3.5, height 1.6
TQFP144_L [mm] "Thin QFP, 144-Leads, Body 20x20mm, Pitch 0.5mm, IPC High Density"
  oval 1.55x0.25 smd: 1(-10.525,8.75) 2(-10.525,8.25) 3(-10.525,7.75) 4(-10.525,7.25) 5(-10.525,6.75) 6(-10.525,6.25) 7(-10.525,5.75) 8(-10.525,5.25) 9(-10.525,4.75) 10(-10.525,4.25) 11(-10.525,3.75) 12(-10.525,3.25) 13(-10.525,2.75) 14(-10.525,2.25) 15(-10.525,1.75) 16(-10.525,1.25) 17(-10.525,0.75) 18(-10.525,0.25) 19(-10.525,-0.25) 20(-10.525,-0.75) 21(-10.525,-1.25) 22(-10.525,-1.75) 23(-10.525,-2.25) 24(-10.525,-2.75) 25(-10.525,-3.25) 26(-10.525,-3.75) 27(-10.525,-4.25) 28(-10.525,-4.75) 29(-10.525,-5.25) 30(-10.525,-5.75) 31(-10.525,-6.25) 32(-10.525,-6.75) 33(-10.525,-7.25) 34(-10.525,-7.75) 35(-10.525,-8.25) 36(-10.525,-8.75) 73(10.525,-8.75) 74(10.525,-8.25) 75(10.525,-7.75) 76(10.525,-7.25) 77(10.525,-6.75) 78(10.525,-6.25) 79(10.525,-5.75) 80(10.525,-5.25) 81(10.525,-4.75) 82(10.525,-4.25) 83(10.525,-3.75) 84(10.525,-3.25) 85(10.525,-2.75) 86(10.525,-2.25) 87(10.525,-1.75) 88(10.525,-1.25) 89(10.525,-0.75) 90(10.525,-0.25) 91(10.525,0.25) 92(10.525,0.75) 93(10.525,1.25) 94(10.525,1.75) 95(10.525,2.25) 96(10.525,2.75) 97(10.525,3.25) 98(10.525,3.75) 99(10.525,4.25) 100(10.525,4.75) 101(10.525,5.25) 102(10.525,5.75) 103(10.525,6.25) 104(10.525,6.75) 105(10.525,7.25) 106(10.525,7.75) 107(10.525,8.25) 108(10.525,8.75)
  oval 0.25x1.55 smd: 37(-8.75,-10.525) 38(-8.25,-10.525) 39(-7.75,-10.525) 40(-7.25,-10.525) 41(-6.75,-10.525) 42(-6.25,-10.525) 43(-5.75,-10.525) 44(-5.25,-10.525) 45(-4.75,-10.525) 46(-4.25,-10.525) 47(-3.75,-10.525) 48(-3.25,-10.525) 49(-2.75,-10.525) 50(-2.25,-10.525) 51(-1.75,-10.525) 52(-1.25,-10.525) 53(-0.75,-10.525) 54(-0.25,-10.525) 55(0.25,-10.525) 56(0.75,-10.525) 57(1.25,-10.525) 58(1.75,-10.525) 59(2.25,-10.525) 60(2.75,-10.525) 61(3.25,-10.525) 62(3.75,-10.525) 63(4.25,-10.525) 64(4.75,-10.525) 65(5.25,-10.525) 66(5.75,-10.525) 67(6.25,-10.525) 68(6.75,-10.525) 69(7.25,-10.525) 70(7.75,-10.525) 71(8.25,-10.525) 72(8.75,-10.525) 109(8.75,10.525) 110(8.25,10.525) 111(7.75,10.525) 112(7.25,10.525) 113(6.75,10.525) 114(6.25,10.525) 115(5.75,10.525) 116(5.25,10.525) 117(4.75,10.525) 118(4.25,10.525) 119(3.75,10.525) 120(3.25,10.525) 121(2.75,10.525) 122(2.25,10.525) 123(1.75,10.525) 124(1.25,10.525) 125(0.75,10.525) 126(0.25,10.525) 127(-0.25,10.525) 128(-0.75,10.525) 129(-1.25,10.525) 130(-1.75,10.525) 131(-2.25,10.525) 132(-2.75,10.525) 133(-3.25,10.525) 134(-3.75,10.525) 135(-4.25,10.525) 136(-4.75,10.525) 137(-5.25,10.525) 138(-5.75,10.525) 139(-6.25,10.525) 140(-6.75,10.525) 141(-7.25,10.525) 142(-7.75,10.525) 143(-8.25,10.525) 144(-8.75,10.525)
  silkscreen extent -10.65,-9.35 9.35,9.55, body extent -10,-10 10,10, height 1.6
"Vishay 3 pin" [mil] "Matched pair"
  rect 60x60 hole 30: 1(-100,0)
  round 60 hole 30: 2(0,0) 3(100,0)
  silkscreen extent -150,-50 150,50
"vishay 3 pin" [mil] "Matched pair"
  rect 60x60 hole 30: 1(-100,0)
  round 60 hole 30: 2(0,0) 3(100,0)
  silkscreen extent -150,-50 150,50
"VISHAY 6 pin" [mil]
  rect 60x60 hole 30: 1(-100,0)
  round 60 hole 30: 2(0,0) 3(100,0) 4(100,150) 5(0,150) 6(-100,150)
  silkscreen extent -150,-100 150,200